# EAGLE board Qwiic_BME688-Panel (EAGLE 9.6.2), part 1 of 3
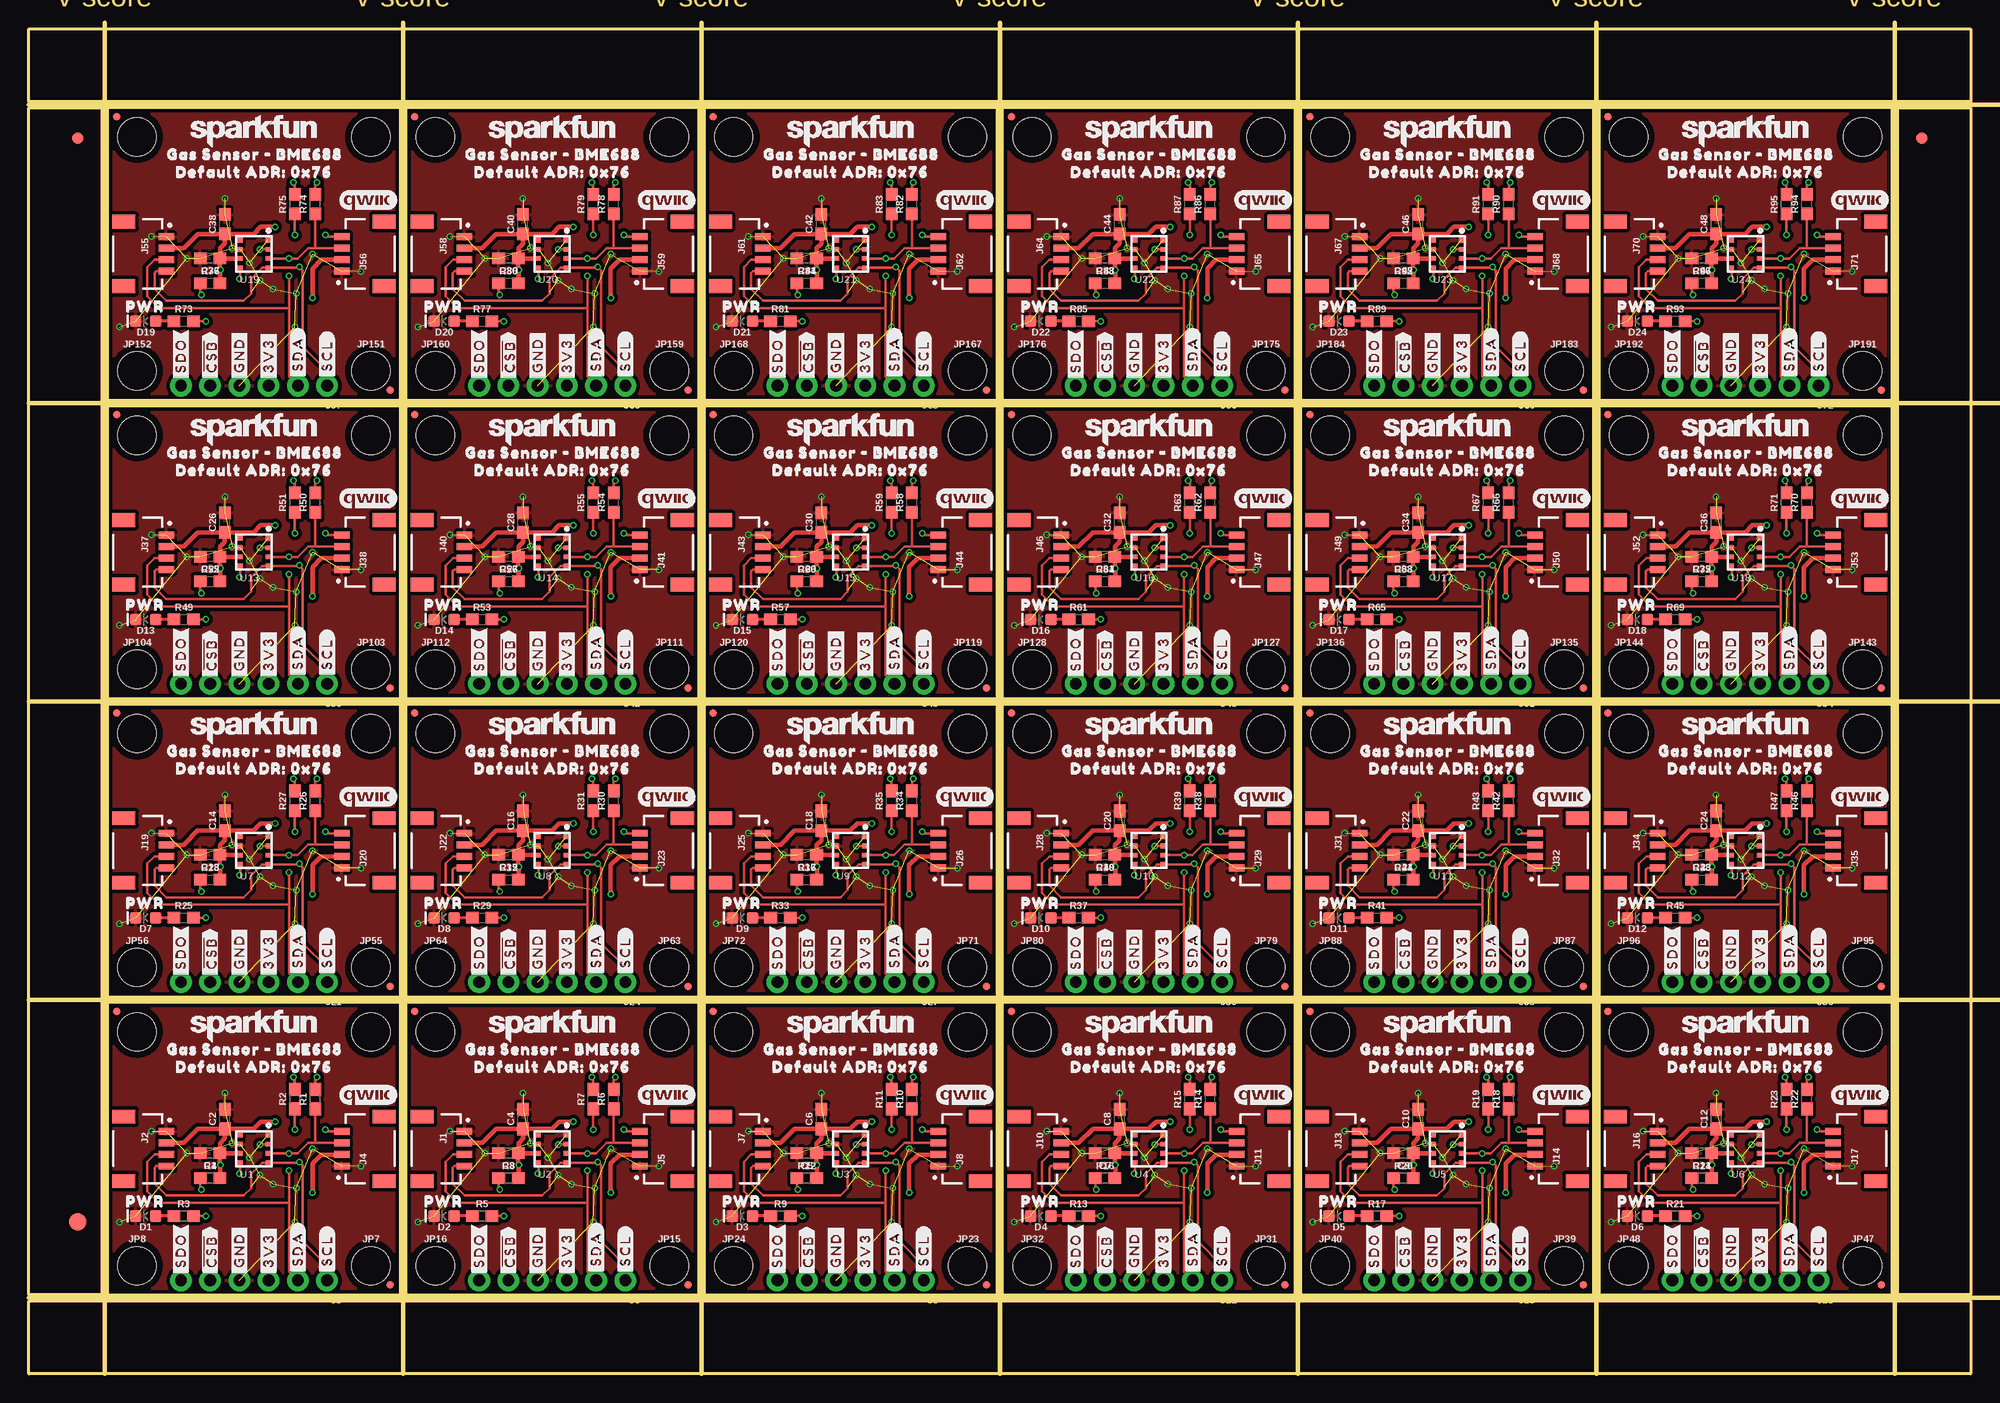
[diagram p0: board, top side]
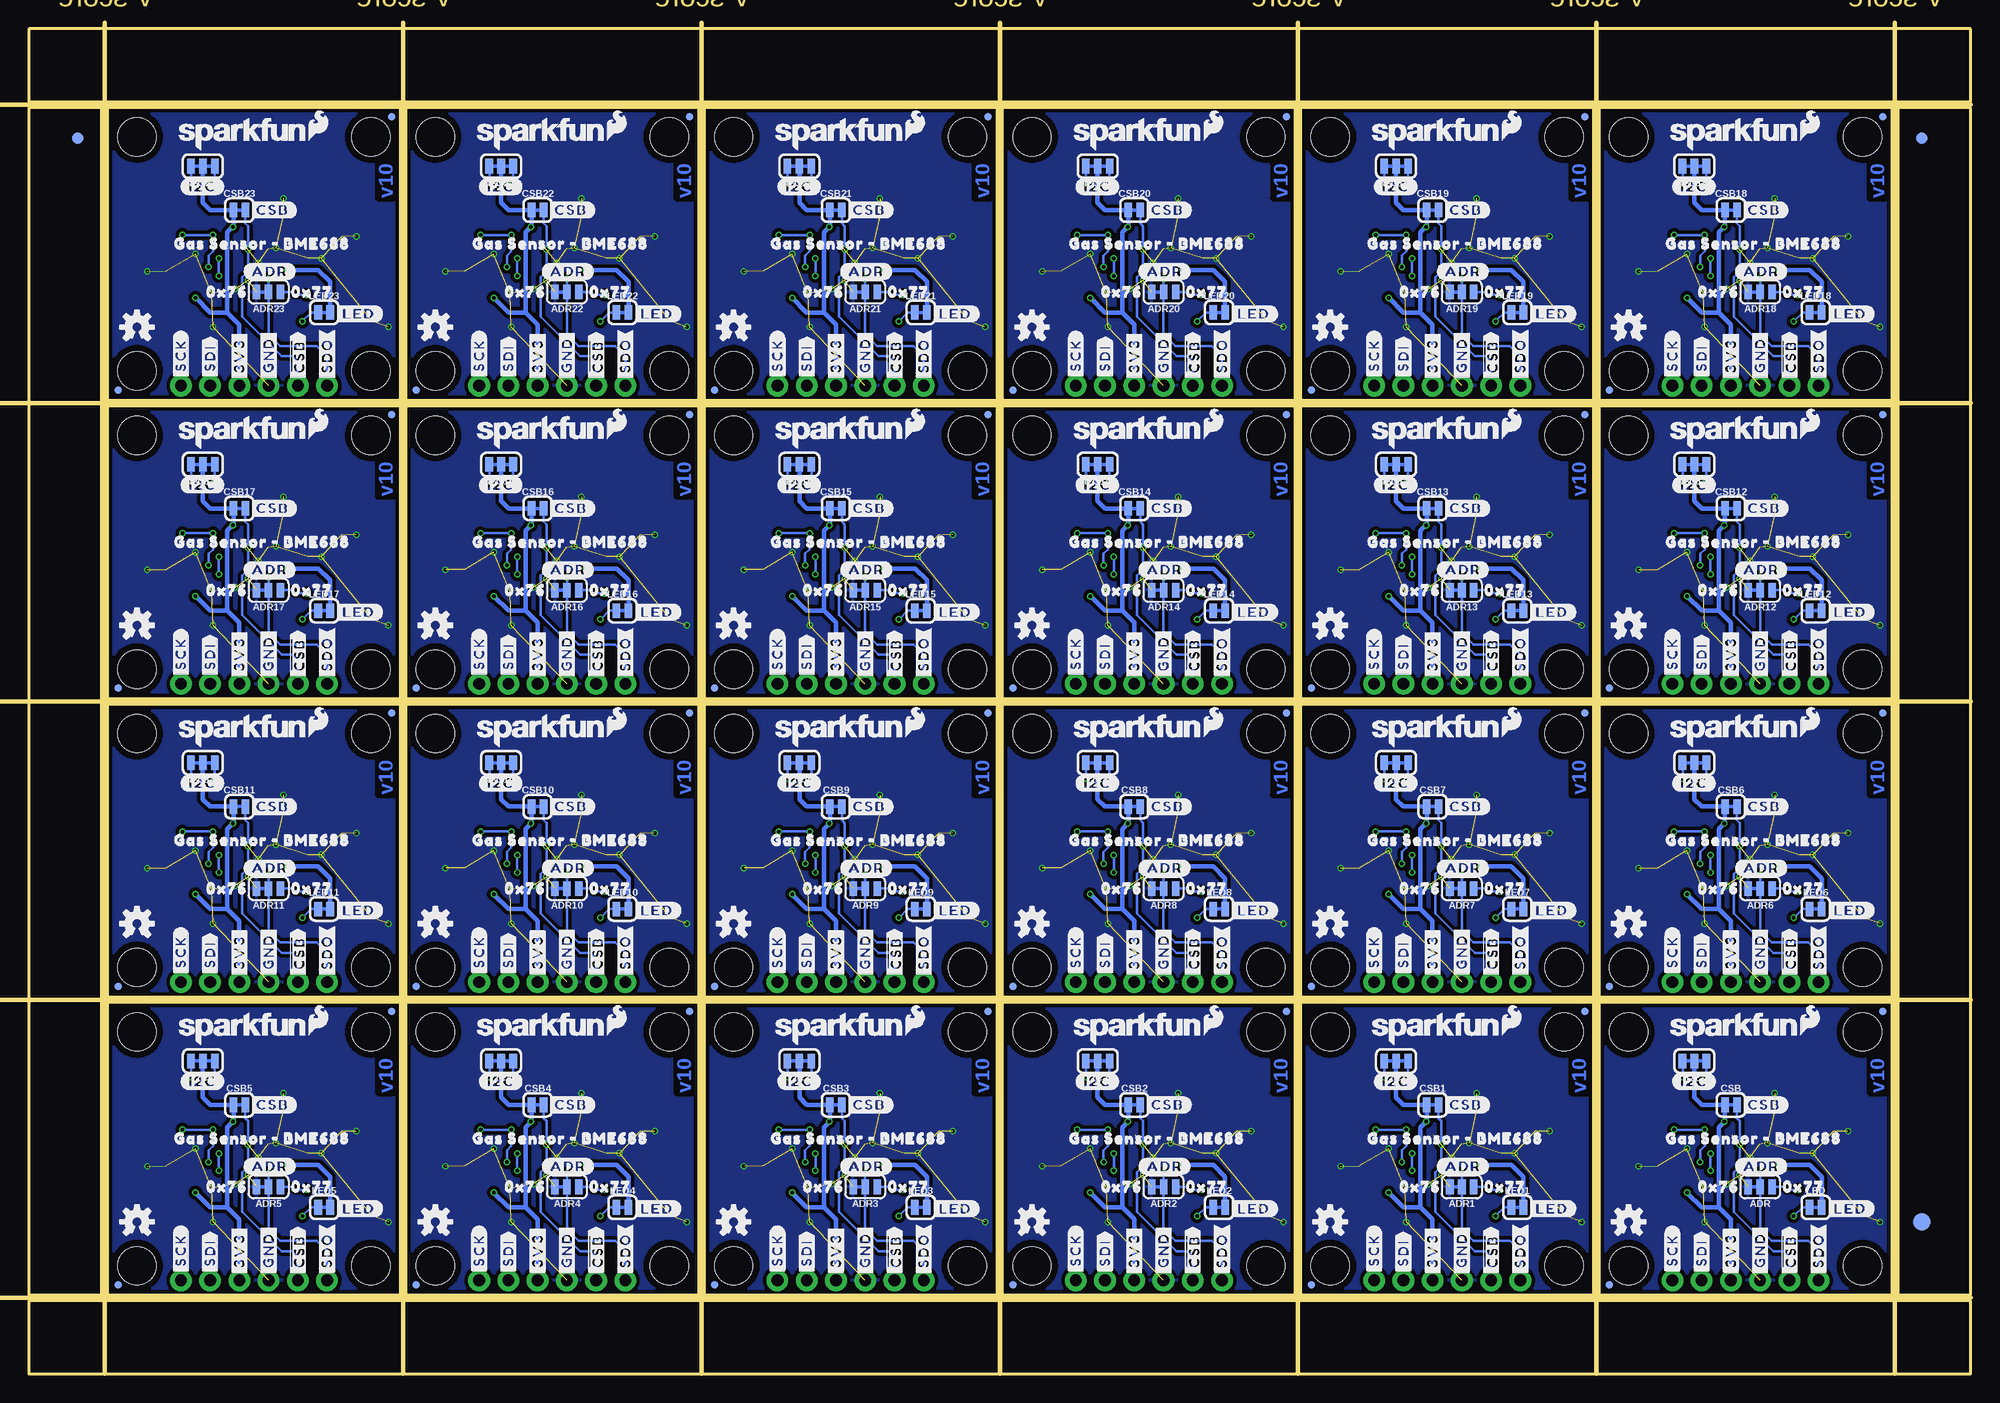
[diagram p1: board, bottom side, seen from below]

Size 168.66 x 116.84 mm. Coordinates in mm from the lower left corner, seen from the top.
Outline: 6.86,6.86 6.86,32.26 32.26,32.26 32.26,6.86 6.86,6.86
Outline: 32.77,6.86 32.77,32.26 58.17,32.26 58.17,6.86 32.77,6.86
Outline: 58.67,6.86 58.67,32.26 84.07,32.26 84.07,6.86 58.67,6.86
Outline: 84.58,6.86 84.58,32.26 109.98,32.26 109.98,6.86 84.58,6.86
Outline: 110.49,6.86 110.49,32.26 135.89,32.26 135.89,6.86 110.49,6.86
Outline: 136.4,6.86 136.4,32.26 161.8,32.26 161.8,6.86 136.4,6.86
Outline: 6.86,32.77 6.86,58.17 32.26,58.17 32.26,32.77 6.86,32.77
Outline: 32.77,32.77 32.77,58.17 58.17,58.17 58.17,32.77 32.77,32.77
Outline: 58.67,32.77 58.67,58.17 84.07,58.17 84.07,32.77 58.67,32.77
Outline: 84.58,32.77 84.58,58.17 109.98,58.17 109.98,32.77 84.58,32.77
Outline: 110.49,32.77 110.49,58.17 135.89,58.17 135.89,32.77 110.49,32.77
Outline: 136.4,32.77 136.4,58.17 161.8,58.17 161.8,32.77 136.4,32.77
Outline: 6.86,58.67 6.86,84.07 32.26,84.07 32.26,58.67 6.86,58.67
Outline: 32.77,58.67 32.77,84.07 58.17,84.07 58.17,58.67 32.77,58.67
Outline: 58.67,58.67 58.67,84.07 84.07,84.07 84.07,58.67 58.67,58.67
Outline: 84.58,58.67 84.58,84.07 109.98,84.07 109.98,58.67 84.58,58.67
Outline: 110.49,58.67 110.49,84.07 135.89,84.07 135.89,58.67 110.49,58.67
Outline: 136.4,58.67 136.4,84.07 161.8,84.07 161.8,58.67 136.4,58.67
Outline: 6.86,84.58 6.86,109.98 32.26,109.98 32.26,84.58 6.86,84.58
Outline: 32.77,84.58 32.77,109.98 58.17,109.98 58.17,84.58 32.77,84.58
Outline: 58.67,84.58 58.67,109.98 84.07,109.98 84.07,84.58 58.67,84.58
Outline: 84.58,84.58 84.58,109.98 109.98,109.98 109.98,84.58 84.58,84.58
Outline: 110.49,84.58 110.49,109.98 135.89,109.98 135.89,84.58 110.49,84.58
Outline: 136.4,84.58 136.4,109.98 161.8,109.98 161.8,84.58 136.4,84.58
Outline: 0,6.35 168.66,6.35 168.66,0 0,0 0,6.35
Outline: 162.31,109.98 168.66,109.98 168.66,6.86 162.31,6.86 162.31,109.98
Outline: 0,116.84 168.66,116.84 168.66,110.49 0,110.49 0,116.84
Outline: 0,109.98 6.35,109.98 6.35,6.86 0,6.86 0,109.98
Copper layers (1*16): Top 0.035mm / dielectric 1.5mm / Bottom 0.035mm
Design rules "Qwiic_BME688": minimum track width 5mil, minimum drill 0.3mm, track to track 5mil, track to pad 5mil, pad to pad 5mil, via to via 5mil, smd to smd 5mil, copper to edge 7mil, drill to drill 7mil, minimum pad ring 5mil, minimum via ring 5mil, stop-mask expansion 2.5mil, vias tented up to drill 25mil, thermal gap 10mil
Milling: 12 lines

## Footprints (pad centres in the part's own frame; a part is rotated, then mirrored left to right if it is on the bottom)
SMT-JUMPER_3_1-NC_TRACE_SILK = smd 0.66 x 1.27: 1 -1.041,0; 2 0,0; 3 1.041,0
0603 = smd 1.1 x 1: 1 -0.85,0; 2 0.85,0
SMT-JUMPER_2_NC_TRACE_SILK = smd 0.66 x 1.27: 1 -0.521,0; 2 0.521,0
LED-0603 = smd 1 x 1: A -0.877,0; C 0.877,0
FIDUCIAL-1X2 = smd 1 x 1: 1 0,0
FIDUCIAL-1.5X3 = smd 1.5 x 1.5: 1 0,0
SMT-JUMPER_3_2-NC_TRACE_SILK = smd 0.66 x 1.27: 1 -1.041,0; 2 0,0; 3 1.041,0
JST04_1MM_RA = smd 0.6 x 1.35: 1 -1.5,0; 2 -0.5,0; 3 0.5,0; 4 1.5,0 | smd 1.2 x 2: NC1 2.8,-3.675; NC2 -2.8,-3.675
1X06_NO_SILK = drill 1.016 pad 1.88: 1 0,0; 2 2.54,0; 3 5.08,0; 4 7.62,0; 5 10.16,0; 6 12.7,0
FIDUCIAL-MICRO = smd 0.635 x 0.635: 1 0,0
STAND-OFF = hole 3.302: 0,0
LGA_8PIN = smd 0.4 x 0.4: 1 1.2,1.2; 2 1.2,0.4; 3 1.2,-0.4; 4 1.2,-1.2; 5 -1.2,-1.2; 6 -1.2,-0.4; 7 -1.2,0.4; 8 -1.2,1.2

## Placement (x,y rotation side)
ADR  JUMPER-SMT_3_1-NC_TRACE_SILK  [SMT-JUMPER_3_1-NC_TRACE_SILK]  18.29,16.26 180 bottom
ADR1  JUMPER-SMT_3_1-NC_TRACE_SILK  [SMT-JUMPER_3_1-NC_TRACE_SILK]  44.2,16.26 180 bottom
ADR2  JUMPER-SMT_3_1-NC_TRACE_SILK  [SMT-JUMPER_3_1-NC_TRACE_SILK]  70.1,16.26 180 bottom
ADR3  JUMPER-SMT_3_1-NC_TRACE_SILK  [SMT-JUMPER_3_1-NC_TRACE_SILK]  96.01,16.26 180 bottom
ADR4  JUMPER-SMT_3_1-NC_TRACE_SILK  [SMT-JUMPER_3_1-NC_TRACE_SILK]  121.92,16.26 180 bottom
ADR5  JUMPER-SMT_3_1-NC_TRACE_SILK  [SMT-JUMPER_3_1-NC_TRACE_SILK]  147.83,16.26 180 bottom
ADR6  JUMPER-SMT_3_1-NC_TRACE_SILK  [SMT-JUMPER_3_1-NC_TRACE_SILK]  18.29,42.16 180 bottom
ADR7  JUMPER-SMT_3_1-NC_TRACE_SILK  [SMT-JUMPER_3_1-NC_TRACE_SILK]  44.2,42.16 180 bottom
ADR8  JUMPER-SMT_3_1-NC_TRACE_SILK  [SMT-JUMPER_3_1-NC_TRACE_SILK]  70.1,42.16 180 bottom
ADR9  JUMPER-SMT_3_1-NC_TRACE_SILK  [SMT-JUMPER_3_1-NC_TRACE_SILK]  96.01,42.16 180 bottom
ADR10  JUMPER-SMT_3_1-NC_TRACE_SILK  [SMT-JUMPER_3_1-NC_TRACE_SILK]  121.92,42.16 180 bottom
ADR11  JUMPER-SMT_3_1-NC_TRACE_SILK  [SMT-JUMPER_3_1-NC_TRACE_SILK]  147.83,42.16 180 bottom
ADR12  JUMPER-SMT_3_1-NC_TRACE_SILK  [SMT-JUMPER_3_1-NC_TRACE_SILK]  18.29,68.07 180 bottom
ADR13  JUMPER-SMT_3_1-NC_TRACE_SILK  [SMT-JUMPER_3_1-NC_TRACE_SILK]  44.2,68.07 180 bottom
ADR14  JUMPER-SMT_3_1-NC_TRACE_SILK  [SMT-JUMPER_3_1-NC_TRACE_SILK]  70.1,68.07 180 bottom
ADR15  JUMPER-SMT_3_1-NC_TRACE_SILK  [SMT-JUMPER_3_1-NC_TRACE_SILK]  96.01,68.07 180 bottom
ADR16  JUMPER-SMT_3_1-NC_TRACE_SILK  [SMT-JUMPER_3_1-NC_TRACE_SILK]  121.92,68.07 180 bottom
ADR17  JUMPER-SMT_3_1-NC_TRACE_SILK  [SMT-JUMPER_3_1-NC_TRACE_SILK]  147.83,68.07 180 bottom
ADR18  JUMPER-SMT_3_1-NC_TRACE_SILK  [SMT-JUMPER_3_1-NC_TRACE_SILK]  18.29,93.98 180 bottom
ADR19  JUMPER-SMT_3_1-NC_TRACE_SILK  [SMT-JUMPER_3_1-NC_TRACE_SILK]  44.2,93.98 180 bottom
ADR20  JUMPER-SMT_3_1-NC_TRACE_SILK  [SMT-JUMPER_3_1-NC_TRACE_SILK]  70.1,93.98 180 bottom
ADR21  JUMPER-SMT_3_1-NC_TRACE_SILK  [SMT-JUMPER_3_1-NC_TRACE_SILK]  96.01,93.98 180 bottom
ADR22  JUMPER-SMT_3_1-NC_TRACE_SILK  [SMT-JUMPER_3_1-NC_TRACE_SILK]  121.92,93.98 180 bottom
ADR23  JUMPER-SMT_3_1-NC_TRACE_SILK  [SMT-JUMPER_3_1-NC_TRACE_SILK]  147.83,93.98 180 bottom
C1  0.1uF  [0603]  15.75,19.18 180 top
C2  0.1uF  [0603]  17.02,22.14 90 top
C3  0.1uF  [0603]  41.66,19.18 180 top
C4  0.1uF  [0603]  42.93,22.14 90 top
C5  0.1uF  [0603]  67.56,19.18 180 top
C6  0.1uF  [0603]  68.83,22.14 90 top
C7  0.1uF  [0603]  93.47,19.18 180 top
C8  0.1uF  [0603]  94.74,22.14 90 top
C9  0.1uF  [0603]  119.38,19.18 180 top
C10  0.1uF  [0603]  120.65,22.14 90 top
C11  0.1uF  [0603]  145.29,19.18 180 top
C12  0.1uF  [0603]  146.56,22.14 90 top
C13  0.1uF  [0603]  15.75,45.08 180 top
C14  0.1uF  [0603]  17.02,48.04 90 top
C15  0.1uF  [0603]  41.66,45.08 180 top
C16  0.1uF  [0603]  42.93,48.04 90 top
C17  0.1uF  [0603]  67.56,45.08 180 top
C18  0.1uF  [0603]  68.83,48.04 90 top
C19  0.1uF  [0603]  93.47,45.08 180 top
C20  0.1uF  [0603]  94.74,48.04 90 top
C21  0.1uF  [0603]  119.38,45.08 180 top
C22  0.1uF  [0603]  120.65,48.04 90 top
C23  0.1uF  [0603]  145.29,45.08 180 top
C24  0.1uF  [0603]  146.56,48.04 90 top
C25  0.1uF  [0603]  15.75,70.99 180 top
C26  0.1uF  [0603]  17.02,73.95 90 top
C27  0.1uF  [0603]  41.66,70.99 180 top
C28  0.1uF  [0603]  42.93,73.95 90 top
C29  0.1uF  [0603]  67.56,70.99 180 top
C30  0.1uF  [0603]  68.83,73.95 90 top
C31  0.1uF  [0603]  93.47,70.99 180 top
C32  0.1uF  [0603]  94.74,73.95 90 top
C33  0.1uF  [0603]  119.38,70.99 180 top
C34  0.1uF  [0603]  120.65,73.95 90 top
C35  0.1uF  [0603]  145.29,70.99 180 top
C36  0.1uF  [0603]  146.56,73.95 90 top
C37  0.1uF  [0603]  15.75,96.9 180 top
C38  0.1uF  [0603]  17.02,99.86 90 top
C39  0.1uF  [0603]  41.66,96.9 180 top
C40  0.1uF  [0603]  42.93,99.86 90 top
C41  0.1uF  [0603]  67.56,96.9 180 top
C42  0.1uF  [0603]  68.83,99.86 90 top
C43  0.1uF  [0603]  93.47,96.9 180 top
C44  0.1uF  [0603]  94.74,99.86 90 top
C45  0.1uF  [0603]  119.38,96.9 180 top
C46  0.1uF  [0603]  120.65,99.86 90 top
C47  0.1uF  [0603]  145.29,96.9 180 top
C48  0.1uF  [0603]  146.56,99.86 90 top
CSB  JUMPER-SMT_2_NC_TRACE_SILK  [SMT-JUMPER_2_NC_TRACE_SILK]  20.83,23.37 0 bottom
CSB1  JUMPER-SMT_2_NC_TRACE_SILK  [SMT-JUMPER_2_NC_TRACE_SILK]  46.74,23.37 0 bottom
CSB2  JUMPER-SMT_2_NC_TRACE_SILK  [SMT-JUMPER_2_NC_TRACE_SILK]  72.64,23.37 0 bottom
CSB3  JUMPER-SMT_2_NC_TRACE_SILK  [SMT-JUMPER_2_NC_TRACE_SILK]  98.55,23.37 0 bottom
CSB4  JUMPER-SMT_2_NC_TRACE_SILK  [SMT-JUMPER_2_NC_TRACE_SILK]  124.46,23.37 0 bottom
CSB5  JUMPER-SMT_2_NC_TRACE_SILK  [SMT-JUMPER_2_NC_TRACE_SILK]  150.37,23.37 0 bottom
CSB6  JUMPER-SMT_2_NC_TRACE_SILK  [SMT-JUMPER_2_NC_TRACE_SILK]  20.83,49.28 0 bottom
CSB7  JUMPER-SMT_2_NC_TRACE_SILK  [SMT-JUMPER_2_NC_TRACE_SILK]  46.74,49.28 0 bottom
CSB8  JUMPER-SMT_2_NC_TRACE_SILK  [SMT-JUMPER_2_NC_TRACE_SILK]  72.64,49.28 0 bottom
CSB9  JUMPER-SMT_2_NC_TRACE_SILK  [SMT-JUMPER_2_NC_TRACE_SILK]  98.55,49.28 0 bottom
CSB10  JUMPER-SMT_2_NC_TRACE_SILK  [SMT-JUMPER_2_NC_TRACE_SILK]  124.46,49.28 0 bottom
CSB11  JUMPER-SMT_2_NC_TRACE_SILK  [SMT-JUMPER_2_NC_TRACE_SILK]  150.37,49.28 0 bottom
CSB12  JUMPER-SMT_2_NC_TRACE_SILK  [SMT-JUMPER_2_NC_TRACE_SILK]  20.83,75.18 0 bottom
CSB13  JUMPER-SMT_2_NC_TRACE_SILK  [SMT-JUMPER_2_NC_TRACE_SILK]  46.74,75.18 0 bottom
CSB14  JUMPER-SMT_2_NC_TRACE_SILK  [SMT-JUMPER_2_NC_TRACE_SILK]  72.64,75.18 0 bottom
CSB15  JUMPER-SMT_2_NC_TRACE_SILK  [SMT-JUMPER_2_NC_TRACE_SILK]  98.55,75.18 0 bottom
CSB16  JUMPER-SMT_2_NC_TRACE_SILK  [SMT-JUMPER_2_NC_TRACE_SILK]  124.46,75.18 0 bottom
CSB17  JUMPER-SMT_2_NC_TRACE_SILK  [SMT-JUMPER_2_NC_TRACE_SILK]  150.37,75.18 0 bottom
CSB18  JUMPER-SMT_2_NC_TRACE_SILK  [SMT-JUMPER_2_NC_TRACE_SILK]  20.83,101.09 0 bottom
CSB19  JUMPER-SMT_2_NC_TRACE_SILK  [SMT-JUMPER_2_NC_TRACE_SILK]  46.74,101.09 0 bottom
CSB20  JUMPER-SMT_2_NC_TRACE_SILK  [SMT-JUMPER_2_NC_TRACE_SILK]  72.64,101.09 0 bottom
CSB21  JUMPER-SMT_2_NC_TRACE_SILK  [SMT-JUMPER_2_NC_TRACE_SILK]  98.55,101.09 0 bottom
CSB22  JUMPER-SMT_2_NC_TRACE_SILK  [SMT-JUMPER_2_NC_TRACE_SILK]  124.46,101.09 0 bottom
CSB23  JUMPER-SMT_2_NC_TRACE_SILK  [SMT-JUMPER_2_NC_TRACE_SILK]  150.37,101.09 0 bottom
D1  RED  [LED-0603]  10.16,13.72 180 top
D2  RED  [LED-0603]  36.07,13.72 180 top
D3  RED  [LED-0603]  61.98,13.72 180 top
D4  RED  [LED-0603]  87.88,13.72 180 top
D5  RED  [LED-0603]  113.79,13.72 180 top
D6  RED  [LED-0603]  139.7,13.72 180 top
D7  RED  [LED-0603]  10.16,39.62 180 top
D8  RED  [LED-0603]  36.07,39.62 180 top
D9  RED  [LED-0603]  61.98,39.62 180 top
D10  RED  [LED-0603]  87.88,39.62 180 top
D11  RED  [LED-0603]  113.79,39.62 180 top
D12  RED  [LED-0603]  139.7,39.62 180 top
D13  RED  [LED-0603]  10.16,65.53 180 top
D14  RED  [LED-0603]  36.07,65.53 180 top
D15  RED  [LED-0603]  61.98,65.53 180 top
D16  RED  [LED-0603]  87.88,65.53 180 top
D17  RED  [LED-0603]  113.79,65.53 180 top
D18  RED  [LED-0603]  139.7,65.53 180 top
D19  RED  [LED-0603]  10.16,91.44 180 top
D20  RED  [LED-0603]  36.07,91.44 180 top
D21  RED  [LED-0603]  61.98,91.44 180 top
D22  RED  [LED-0603]  87.88,91.44 180 top
D23  RED  [LED-0603]  113.79,91.44 180 top
D24  RED  [LED-0603]  139.7,91.44 180 top
E$1  [FIDUCIAL-1X2]  4.23,107.31 0 top
E$2  [FIDUCIAL-1X2]  4.23,107.31 0 bottom
E$3  [FIDUCIAL-1X2]  164.42,107.31 0 top
E$4  [FIDUCIAL-1X2]  164.42,107.31 0 bottom
E$5  [FIDUCIAL-1.5X3]  4.23,13.21 0 top
E$6  [FIDUCIAL-1.5X3]  4.23,13.21 0 bottom
I2C  JUMPER-SMT_3_2-NC_TRACE_SILK  [SMT-JUMPER_3_2-NC_TRACE_SILK]  24,27.18 180 bottom
I2C1  JUMPER-SMT_3_2-NC_TRACE_SILK  [SMT-JUMPER_3_2-NC_TRACE_SILK]  49.91,27.18 180 bottom
I2C2  JUMPER-SMT_3_2-NC_TRACE_SILK  [SMT-JUMPER_3_2-NC_TRACE_SILK]  75.82,27.18 180 bottom
I2C3  JUMPER-SMT_3_2-NC_TRACE_SILK  [SMT-JUMPER_3_2-NC_TRACE_SILK]  101.73,27.18 180 bottom
I2C4  JUMPER-SMT_3_2-NC_TRACE_SILK  [SMT-JUMPER_3_2-NC_TRACE_SILK]  127.64,27.18 180 bottom
I2C5  JUMPER-SMT_3_2-NC_TRACE_SILK  [SMT-JUMPER_3_2-NC_TRACE_SILK]  153.54,27.18 180 bottom
I2C6  JUMPER-SMT_3_2-NC_TRACE_SILK  [SMT-JUMPER_3_2-NC_TRACE_SILK]  24,53.09 180 bottom
I2C7  JUMPER-SMT_3_2-NC_TRACE_SILK  [SMT-JUMPER_3_2-NC_TRACE_SILK]  49.91,53.09 180 bottom
I2C8  JUMPER-SMT_3_2-NC_TRACE_SILK  [SMT-JUMPER_3_2-NC_TRACE_SILK]  75.82,53.09 180 bottom
I2C9  JUMPER-SMT_3_2-NC_TRACE_SILK  [SMT-JUMPER_3_2-NC_TRACE_SILK]  101.73,53.09 180 bottom
I2C10  JUMPER-SMT_3_2-NC_TRACE_SILK  [SMT-JUMPER_3_2-NC_TRACE_SILK]  127.64,53.09 180 bottom
I2C11  JUMPER-SMT_3_2-NC_TRACE_SILK  [SMT-JUMPER_3_2-NC_TRACE_SILK]  153.54,53.09 180 bottom
I2C12  JUMPER-SMT_3_2-NC_TRACE_SILK  [SMT-JUMPER_3_2-NC_TRACE_SILK]  24,78.99 180 bottom
I2C13  JUMPER-SMT_3_2-NC_TRACE_SILK  [SMT-JUMPER_3_2-NC_TRACE_SILK]  49.91,78.99 180 bottom
I2C14  JUMPER-SMT_3_2-NC_TRACE_SILK  [SMT-JUMPER_3_2-NC_TRACE_SILK]  75.82,78.99 180 bottom
I2C15  JUMPER-SMT_3_2-NC_TRACE_SILK  [SMT-JUMPER_3_2-NC_TRACE_SILK]  101.73,78.99 180 bottom
I2C16  JUMPER-SMT_3_2-NC_TRACE_SILK  [SMT-JUMPER_3_2-NC_TRACE_SILK]  127.64,78.99 180 bottom
I2C17  JUMPER-SMT_3_2-NC_TRACE_SILK  [SMT-JUMPER_3_2-NC_TRACE_SILK]  153.54,78.99 180 bottom
I2C18  JUMPER-SMT_3_2-NC_TRACE_SILK  [SMT-JUMPER_3_2-NC_TRACE_SILK]  24,104.9 180 bottom
I2C19  JUMPER-SMT_3_2-NC_TRACE_SILK  [SMT-JUMPER_3_2-NC_TRACE_SILK]  49.91,104.9 180 bottom
I2C20  JUMPER-SMT_3_2-NC_TRACE_SILK  [SMT-JUMPER_3_2-NC_TRACE_SILK]  75.82,104.9 180 bottom
I2C21  JUMPER-SMT_3_2-NC_TRACE_SILK  [SMT-JUMPER_3_2-NC_TRACE_SILK]  101.73,104.9 180 bottom
I2C22  JUMPER-SMT_3_2-NC_TRACE_SILK  [SMT-JUMPER_3_2-NC_TRACE_SILK]  127.64,104.9 180 bottom
I2C23  JUMPER-SMT_3_2-NC_TRACE_SILK  [SMT-JUMPER_3_2-NC_TRACE_SILK]  153.54,104.9 180 bottom
J1  QWIIC_RA  [JST04_1MM_RA]  37.85,19.56 270 top
J2  QWIIC_RA  [JST04_1MM_RA]  11.94,19.56 270 top
J3  [1X06_NO_SILK]  25.91,8.13 180 top
J4  QWIIC_RA  [JST04_1MM_RA]  27.18,19.56 90 top
J5  QWIIC_RA  [JST04_1MM_RA]  53.09,19.56 90 top
J6  [1X06_NO_SILK]  51.82,8.13 180 top
J7  QWIIC_RA  [JST04_1MM_RA]  63.75,19.56 270 top
J8  QWIIC_RA  [JST04_1MM_RA]  78.99,19.56 90 top
J9  [1X06_NO_SILK]  77.72,8.13 180 top
J10  QWIIC_RA  [JST04_1MM_RA]  89.66,19.56 270 top
J11  QWIIC_RA  [JST04_1MM_RA]  104.9,19.56 90 top
J12  [1X06_NO_SILK]  103.63,8.13 180 top
J13  QWIIC_RA  [JST04_1MM_RA]  115.57,19.56 270 top
J14  QWIIC_RA  [JST04_1MM_RA]  130.81,19.56 90 top
J15  [1X06_NO_SILK]  129.54,8.13 180 top
J16  QWIIC_RA  [JST04_1MM_RA]  141.48,19.56 270 top
J17  QWIIC_RA  [JST04_1MM_RA]  156.72,19.56 90 top
J18  [1X06_NO_SILK]  155.45,8.13 180 top
J19  QWIIC_RA  [JST04_1MM_RA]  11.94,45.47 270 top
J20  QWIIC_RA  [JST04_1MM_RA]  27.18,45.47 90 top
J21  [1X06_NO_SILK]  25.91,34.04 180 top
J22  QWIIC_RA  [JST04_1MM_RA]  37.85,45.47 270 top
J23  QWIIC_RA  [JST04_1MM_RA]  53.09,45.47 90 top
J24  [1X06_NO_SILK]  51.82,34.04 180 top
J25  QWIIC_RA  [JST04_1MM_RA]  63.75,45.47 270 top
J26  QWIIC_RA  [JST04_1MM_RA]  78.99,45.47 90 top
J27  [1X06_NO_SILK]  77.72,34.04 180 top
J28  QWIIC_RA  [JST04_1MM_RA]  89.66,45.47 270 top
J29  QWIIC_RA  [JST04_1MM_RA]  104.9,45.47 90 top
J30  [1X06_NO_SILK]  103.63,34.04 180 top
J31  QWIIC_RA  [JST04_1MM_RA]  115.57,45.47 270 top
J32  QWIIC_RA  [JST04_1MM_RA]  130.81,45.47 90 top
J33  [1X06_NO_SILK]  129.54,34.04 180 top
J34  QWIIC_RA  [JST04_1MM_RA]  141.48,45.47 270 top
J35  QWIIC_RA  [JST04_1MM_RA]  156.72,45.47 90 top
J36  [1X06_NO_SILK]  155.45,34.04 180 top
J37  QWIIC_RA  [JST04_1MM_RA]  11.94,71.37 270 top
J38  QWIIC_RA  [JST04_1MM_RA]  27.18,71.37 90 top
J39  [1X06_NO_SILK]  25.91,59.94 180 top
J40  QWIIC_RA  [JST04_1MM_RA]  37.85,71.37 270 top
J41  QWIIC_RA  [JST04_1MM_RA]  53.09,71.37 90 top
J42  [1X06_NO_SILK]  51.82,59.94 180 top
J43  QWIIC_RA  [JST04_1MM_RA]  63.75,71.37 270 top
J44  QWIIC_RA  [JST04_1MM_RA]  78.99,71.37 90 top
J45  [1X06_NO_SILK]  77.72,59.94 180 top
J46  QWIIC_RA  [JST04_1MM_RA]  89.66,71.37 270 top
J47  QWIIC_RA  [JST04_1MM_RA]  104.9,71.37 90 top
J48  [1X06_NO_SILK]  103.63,59.94 180 top
J49  QWIIC_RA  [JST04_1MM_RA]  115.57,71.37 270 top
J50  QWIIC_RA  [JST04_1MM_RA]  130.81,71.37 90 top
J51  [1X06_NO_SILK]  129.54,59.94 180 top
J52  QWIIC_RA  [JST04_1MM_RA]  141.48,71.37 270 top
J53  QWIIC_RA  [JST04_1MM_RA]  156.72,71.37 90 top
J54  [1X06_NO_SILK]  155.45,59.94 180 top
J55  QWIIC_RA  [JST04_1MM_RA]  11.94,97.28 270 top
J56  QWIIC_RA  [JST04_1MM_RA]  27.18,97.28 90 top
J57  [1X06_NO_SILK]  25.91,85.85 180 top
J58  QWIIC_RA  [JST04_1MM_RA]  37.85,97.28 270 top
J59  QWIIC_RA  [JST04_1MM_RA]  53.09,97.28 90 top
J60  [1X06_NO_SILK]  51.82,85.85 180 top
J61  QWIIC_RA  [JST04_1MM_RA]  63.75,97.28 270 top
J62  QWIIC_RA  [JST04_1MM_RA]  78.99,97.28 90 top
J63  [1X06_NO_SILK]  77.72,85.85 180 top
J64  QWIIC_RA  [JST04_1MM_RA]  89.66,97.28 270 top
J65  QWIIC_RA  [JST04_1MM_RA]  104.9,97.28 90 top
J66  [1X06_NO_SILK]  103.63,85.85 180 top
J67  QWIIC_RA  [JST04_1MM_RA]  115.57,97.28 270 top
J68  QWIIC_RA  [JST04_1MM_RA]  130.81,97.28 90 top
J69  [1X06_NO_SILK]  129.54,85.85 180 top
J70  QWIIC_RA  [JST04_1MM_RA]  141.48,97.28 270 top
J71  QWIIC_RA  [JST04_1MM_RA]  156.72,97.28 90 top
J72  [1X06_NO_SILK]  155.45,85.85 180 top
JP1  FIDUCIALUFIDUCIAL  [FIDUCIAL-MICRO]  7.62,31.5 0 bottom
JP2  FIDUCIALUFIDUCIAL  [FIDUCIAL-MICRO]  31.37,7.75 0 top
JP3  STAND-OFF  [STAND-OFF]  9.4,29.72 0 top
JP4  STAND-OFF  [STAND-OFF]  29.72,29.72 0 top
JP5  FIDUCIALUFIDUCIAL  [FIDUCIAL-MICRO]  31.37,7.75 0 bottom
JP6  FIDUCIALUFIDUCIAL  [FIDUCIAL-MICRO]  7.62,31.5 0 top
JP7  STAND-OFF  [STAND-OFF]  29.72,9.4 0 top
JP8  STAND-OFF  [STAND-OFF]  9.4,9.4 0 top
JP9  STAND-OFF  [STAND-OFF]  35.31,29.72 0 top
JP10  STAND-OFF  [STAND-OFF]  55.63,29.72 0 top
JP11  FIDUCIALUFIDUCIAL  [FIDUCIAL-MICRO]  57.28,7.75 0 top
JP12  FIDUCIALUFIDUCIAL  [FIDUCIAL-MICRO]  33.53,31.5 0 top
JP13  FIDUCIALUFIDUCIAL  [FIDUCIAL-MICRO]  33.53,31.5 0 bottom
JP14  FIDUCIALUFIDUCIAL  [FIDUCIAL-MICRO]  57.28,7.75 0 bottom
JP15  STAND-OFF  [STAND-OFF]  55.63,9.4 0 top
JP16  STAND-OFF  [STAND-OFF]  35.31,9.4 0 top
JP17  STAND-OFF  [STAND-OFF]  61.21,29.72 0 top
JP18  STAND-OFF  [STAND-OFF]  81.53,29.72 0 top
JP19  FIDUCIALUFIDUCIAL  [FIDUCIAL-MICRO]  83.19,7.75 0 top
JP20  FIDUCIALUFIDUCIAL  [FIDUCIAL-MICRO]  59.44,31.5 0 top
JP21  FIDUCIALUFIDUCIAL  [FIDUCIAL-MICRO]  59.44,31.5 0 bottom
JP22  FIDUCIALUFIDUCIAL  [FIDUCIAL-MICRO]  83.19,7.75 0 bottom
JP23  STAND-OFF  [STAND-OFF]  81.53,9.4 0 top
JP24  STAND-OFF  [STAND-OFF]  61.21,9.4 0 top
JP25  STAND-OFF  [STAND-OFF]  87.12,29.72 0 top
JP26  STAND-OFF  [STAND-OFF]  107.44,29.72 0 top
JP27  FIDUCIALUFIDUCIAL  [FIDUCIAL-MICRO]  109.09,7.75 0 top
JP28  FIDUCIALUFIDUCIAL  [FIDUCIAL-MICRO]  85.34,31.5 0 top
JP29  FIDUCIALUFIDUCIAL  [FIDUCIAL-MICRO]  85.34,31.5 0 bottom
JP30  FIDUCIALUFIDUCIAL  [FIDUCIAL-MICRO]  109.09,7.75 0 bottom
JP31  STAND-OFF  [STAND-OFF]  107.44,9.4 0 top
JP32  STAND-OFF  [STAND-OFF]  87.12,9.4 0 top
JP33  STAND-OFF  [STAND-OFF]  113.03,29.72 0 top
JP34  STAND-OFF  [STAND-OFF]  133.35,29.72 0 top
JP35  FIDUCIALUFIDUCIAL  [FIDUCIAL-MICRO]  135,7.75 0 top
JP36  FIDUCIALUFIDUCIAL  [FIDUCIAL-MICRO]  111.25,31.5 0 top
JP37  FIDUCIALUFIDUCIAL  [FIDUCIAL-MICRO]  111.25,31.5 0 bottom
JP38  FIDUCIALUFIDUCIAL  [FIDUCIAL-MICRO]  135,7.75 0 bottom
JP39  STAND-OFF  [STAND-OFF]  133.35,9.4 0 top
JP40  STAND-OFF  [STAND-OFF]  113.03,9.4 0 top
JP41  STAND-OFF  [STAND-OFF]  138.94,29.72 0 top
JP42  STAND-OFF  [STAND-OFF]  159.26,29.72 0 top
JP43  FIDUCIALUFIDUCIAL  [FIDUCIAL-MICRO]  160.91,7.75 0 top
JP44  FIDUCIALUFIDUCIAL  [FIDUCIAL-MICRO]  137.16,31.5 0 top
JP45  FIDUCIALUFIDUCIAL  [FIDUCIAL-MICRO]  137.16,31.5 0 bottom
JP46  FIDUCIALUFIDUCIAL  [FIDUCIAL-MICRO]  160.91,7.75 0 bottom
JP47  STAND-OFF  [STAND-OFF]  159.26,9.4 0 top
JP48  STAND-OFF  [STAND-OFF]  138.94,9.4 0 top
JP49  STAND-OFF  [STAND-OFF]  9.4,55.63 0 top
JP50  STAND-OFF  [STAND-OFF]  29.72,55.63 0 top
JP51  FIDUCIALUFIDUCIAL  [FIDUCIAL-MICRO]  31.37,33.66 0 top
JP52  FIDUCIALUFIDUCIAL  [FIDUCIAL-MICRO]  7.62,57.4 0 top
JP53  FIDUCIALUFIDUCIAL  [FIDUCIAL-MICRO]  7.62,57.4 0 bottom
JP54  FIDUCIALUFIDUCIAL  [FIDUCIAL-MICRO]  31.37,33.66 0 bottom
JP55  STAND-OFF  [STAND-OFF]  29.72,35.31 0 top
JP56  STAND-OFF  [STAND-OFF]  9.4,35.31 0 top
JP57  STAND-OFF  [STAND-OFF]  35.31,55.63 0 top
JP58  STAND-OFF  [STAND-OFF]  55.63,55.63 0 top
JP59  FIDUCIALUFIDUCIAL  [FIDUCIAL-MICRO]  57.28,33.66 0 top
JP60  FIDUCIALUFIDUCIAL  [FIDUCIAL-MICRO]  33.53,57.4 0 top
JP61  FIDUCIALUFIDUCIAL  [FIDUCIAL-MICRO]  33.53,57.4 0 bottom
JP62  FIDUCIALUFIDUCIAL  [FIDUCIAL-MICRO]  57.28,33.66 0 bottom
JP63  STAND-OFF  [STAND-OFF]  55.63,35.31 0 top
JP64  STAND-OFF  [STAND-OFF]  35.31,35.31 0 top
JP65  STAND-OFF  [STAND-OFF]  61.21,55.63 0 top
JP66  STAND-OFF  [STAND-OFF]  81.53,55.63 0 top
JP67  FIDUCIALUFIDUCIAL  [FIDUCIAL-MICRO]  83.19,33.66 0 top
JP68  FIDUCIALUFIDUCIAL  [FIDUCIAL-MICRO]  59.44,57.4 0 top
JP69  FIDUCIALUFIDUCIAL  [FIDUCIAL-MICRO]  59.44,57.4 0 bottom
JP70  FIDUCIALUFIDUCIAL  [FIDUCIAL-MICRO]  83.19,33.66 0 bottom
JP71  STAND-OFF  [STAND-OFF]  81.53,35.31 0 top
JP72  STAND-OFF  [STAND-OFF]  61.21,35.31 0 top
JP73  STAND-OFF  [STAND-OFF]  87.12,55.63 0 top
JP74  STAND-OFF  [STAND-OFF]  107.44,55.63 0 top
JP75  FIDUCIALUFIDUCIAL  [FIDUCIAL-MICRO]  109.09,33.66 0 top
JP76  FIDUCIALUFIDUCIAL  [FIDUCIAL-MICRO]  85.34,57.4 0 top
JP77  FIDUCIALUFIDUCIAL  [FIDUCIAL-MICRO]  85.34,57.4 0 bottom
JP78  FIDUCIALUFIDUCIAL  [FIDUCIAL-MICRO]  109.09,33.66 0 bottom
JP79  STAND-OFF  [STAND-OFF]  107.44,35.31 0 top
JP80  STAND-OFF  [STAND-OFF]  87.12,35.31 0 top
JP81  STAND-OFF  [STAND-OFF]  113.03,55.63 0 top
JP82  STAND-OFF  [STAND-OFF]  133.35,55.63 0 top
JP83  FIDUCIALUFIDUCIAL  [FIDUCIAL-MICRO]  135,33.66 0 top
JP84  FIDUCIALUFIDUCIAL  [FIDUCIAL-MICRO]  111.25,57.4 0 top
JP85  FIDUCIALUFIDUCIAL  [FIDUCIAL-MICRO]  111.25,57.4 0 bottom
JP86  FIDUCIALUFIDUCIAL  [FIDUCIAL-MICRO]  135,33.66 0 bottom
JP87  STAND-OFF  [STAND-OFF]  133.35,35.31 0 top
JP88  STAND-OFF  [STAND-OFF]  113.03,35.31 0 top
JP89  STAND-OFF  [STAND-OFF]  138.94,55.63 0 top
JP90  STAND-OFF  [STAND-OFF]  159.26,55.63 0 top
JP91  FIDUCIALUFIDUCIAL  [FIDUCIAL-MICRO]  160.91,33.66 0 top
JP92  FIDUCIALUFIDUCIAL  [FIDUCIAL-MICRO]  137.16,57.4 0 top
JP93  FIDUCIALUFIDUCIAL  [FIDUCIAL-MICRO]  137.16,57.4 0 bottom
JP94  FIDUCIALUFIDUCIAL  [FIDUCIAL-MICRO]  160.91,33.66 0 bottom
JP95  STAND-OFF  [STAND-OFF]  159.26,35.31 0 top
JP96  STAND-OFF  [STAND-OFF]  138.94,35.31 0 top
JP97  STAND-OFF  [STAND-OFF]  9.4,81.53 0 top
JP98  STAND-OFF  [STAND-OFF]  29.72,81.53 0 top
JP99  FIDUCIALUFIDUCIAL  [FIDUCIAL-MICRO]  31.37,59.56 0 top
JP100  FIDUCIALUFIDUCIAL  [FIDUCIAL-MICRO]  7.62,83.31 0 top
JP101  FIDUCIALUFIDUCIAL  [FIDUCIAL-MICRO]  7.62,83.31 0 bottom
JP102  FIDUCIALUFIDUCIAL  [FIDUCIAL-MICRO]  31.37,59.56 0 bottom
JP103  STAND-OFF  [STAND-OFF]  29.72,61.21 0 top
JP104  STAND-OFF  [STAND-OFF]  9.4,61.21 0 top
JP105  STAND-OFF  [STAND-OFF]  35.31,81.53 0 top
JP106  STAND-OFF  [STAND-OFF]  55.63,81.53 0 top
JP107  FIDUCIALUFIDUCIAL  [FIDUCIAL-MICRO]  57.28,59.56 0 top
JP108  FIDUCIALUFIDUCIAL  [FIDUCIAL-MICRO]  33.53,83.31 0 top
JP109  FIDUCIALUFIDUCIAL  [FIDUCIAL-MICRO]  33.53,83.31 0 bottom
JP110  FIDUCIALUFIDUCIAL  [FIDUCIAL-MICRO]  57.28,59.56 0 bottom
JP111  STAND-OFF  [STAND-OFF]  55.63,61.21 0 top
JP112  STAND-OFF  [STAND-OFF]  35.31,61.21 0 top
JP113  STAND-OFF  [STAND-OFF]  61.21,81.53 0 top
JP114  STAND-OFF  [STAND-OFF]  81.53,81.53 0 top
JP115  FIDUCIALUFIDUCIAL  [FIDUCIAL-MICRO]  83.19,59.56 0 top
JP116  FIDUCIALUFIDUCIAL  [FIDUCIAL-MICRO]  59.44,83.31 0 top
JP117  FIDUCIALUFIDUCIAL  [FIDUCIAL-MICRO]  59.44,83.31 0 bottom
JP118  FIDUCIALUFIDUCIAL  [FIDUCIAL-MICRO]  83.19,59.56 0 bottom
JP119  STAND-OFF  [STAND-OFF]  81.53,61.21 0 top
JP120  STAND-OFF  [STAND-OFF]  61.21,61.21 0 top
JP121  STAND-OFF  [STAND-OFF]  87.12,81.53 0 top
JP122  STAND-OFF  [STAND-OFF]  107.44,81.53 0 top
JP123  FIDUCIALUFIDUCIAL  [FIDUCIAL-MICRO]  109.09,59.56 0 top
JP124  FIDUCIALUFIDUCIAL  [FIDUCIAL-MICRO]  85.34,83.31 0 top
JP125  FIDUCIALUFIDUCIAL  [FIDUCIAL-MICRO]  85.34,83.31 0 bottom
JP126  FIDUCIALUFIDUCIAL  [FIDUCIAL-MICRO]  109.09,59.56 0 bottom
JP127  STAND-OFF  [STAND-OFF]  107.44,61.21 0 top
JP128  STAND-OFF  [STAND-OFF]  87.12,61.21 0 top
JP129  STAND-OFF  [STAND-OFF]  113.03,81.53 0 top
JP130  STAND-OFF  [STAND-OFF]  133.35,81.53 0 top
JP131  FIDUCIALUFIDUCIAL  [FIDUCIAL-MICRO]  135,59.56 0 top
JP132  FIDUCIALUFIDUCIAL  [FIDUCIAL-MICRO]  111.25,83.31 0 top
JP133  FIDUCIALUFIDUCIAL  [FIDUCIAL-MICRO]  111.25,83.31 0 bottom
JP134  FIDUCIALUFIDUCIAL  [FIDUCIAL-MICRO]  135,59.56 0 bottom
JP135  STAND-OFF  [STAND-OFF]  133.35,61.21 0 top
JP136  STAND-OFF  [STAND-OFF]  113.03,61.21 0 top
JP137  STAND-OFF  [STAND-OFF]  138.94,81.53 0 top
JP138  STAND-OFF  [STAND-OFF]  159.26,81.53 0 top
JP139  FIDUCIALUFIDUCIAL  [FIDUCIAL-MICRO]  160.91,59.56 0 top
JP140  FIDUCIALUFIDUCIAL  [FIDUCIAL-MICRO]  137.16,83.31 0 top
JP141  FIDUCIALUFIDUCIAL  [FIDUCIAL-MICRO]  137.16,83.31 0 bottom
JP142  FIDUCIALUFIDUCIAL  [FIDUCIAL-MICRO]  160.91,59.56 0 bottom
JP143  STAND-OFF  [STAND-OFF]  159.26,61.21 0 top
JP144  STAND-OFF  [STAND-OFF]  138.94,61.21 0 top
JP145  STAND-OFF  [STAND-OFF]  9.4,107.44 0 top
JP146  STAND-OFF  [STAND-OFF]  29.72,107.44 0 top
JP147  FIDUCIALUFIDUCIAL  [FIDUCIAL-MICRO]  31.37,85.47 0 top
JP148  FIDUCIALUFIDUCIAL  [FIDUCIAL-MICRO]  7.62,109.22 0 top
JP149  FIDUCIALUFIDUCIAL  [FIDUCIAL-MICRO]  7.62,109.22 0 bottom
JP150  FIDUCIALUFIDUCIAL  [FIDUCIAL-MICRO]  31.37,85.47 0 bottom
JP151  STAND-OFF  [STAND-OFF]  29.72,87.12 0 top
JP152  STAND-OFF  [STAND-OFF]  9.4,87.12 0 top
JP153  STAND-OFF  [STAND-OFF]  35.31,107.44 0 top
JP154  STAND-OFF  [STAND-OFF]  55.63,107.44 0 top
JP155  FIDUCIALUFIDUCIAL  [FIDUCIAL-MICRO]  57.28,85.47 0 top
JP156  FIDUCIALUFIDUCIAL  [FIDUCIAL-MICRO]  33.53,109.22 0 top
JP157  FIDUCIALUFIDUCIAL  [FIDUCIAL-MICRO]  33.53,109.22 0 bottom
JP158  FIDUCIALUFIDUCIAL  [FIDUCIAL-MICRO]  57.28,85.47 0 bottom
JP159  STAND-OFF  [STAND-OFF]  55.63,87.12 0 top
JP160  STAND-OFF  [STAND-OFF]  35.31,87.12 0 top
JP161  STAND-OFF  [STAND-OFF]  61.21,107.44 0 top
JP162  STAND-OFF  [STAND-OFF]  81.53,107.44 0 top
JP163  FIDUCIALUFIDUCIAL  [FIDUCIAL-MICRO]  83.19,85.47 0 top
JP164  FIDUCIALUFIDUCIAL  [FIDUCIAL-MICRO]  59.44,109.22 0 top
JP165  FIDUCIALUFIDUCIAL  [FIDUCIAL-MICRO]  59.44,109.22 0 bottom
JP166  FIDUCIALUFIDUCIAL  [FIDUCIAL-MICRO]  83.19,85.47 0 bottom
JP167  STAND-OFF  [STAND-OFF]  81.53,87.12 0 top
JP168  STAND-OFF  [STAND-OFF]  61.21,87.12 0 top
JP169  STAND-OFF  [STAND-OFF]  87.12,107.44 0 top
JP170  STAND-OFF  [STAND-OFF]  107.44,107.44 0 top
JP171  FIDUCIALUFIDUCIAL  [FIDUCIAL-MICRO]  109.09,85.47 0 top
JP172  FIDUCIALUFIDUCIAL  [FIDUCIAL-MICRO]  85.34,109.22 0 top
JP173  FIDUCIALUFIDUCIAL  [FIDUCIAL-MICRO]  85.34,109.22 0 bottom
JP174  FIDUCIALUFIDUCIAL  [FIDUCIAL-MICRO]  109.09,85.47 0 bottom
JP175  STAND-OFF  [STAND-OFF]  107.44,87.12 0 top
JP176  STAND-OFF  [STAND-OFF]  87.12,87.12 0 top
JP177  STAND-OFF  [STAND-OFF]  113.03,107.44 0 top
JP178  STAND-OFF  [STAND-OFF]  133.35,107.44 0 top
JP179  FIDUCIALUFIDUCIAL  [FIDUCIAL-MICRO]  135,85.47 0 top
JP180  FIDUCIALUFIDUCIAL  [FIDUCIAL-MICRO]  111.25,109.22 0 top
JP181  FIDUCIALUFIDUCIAL  [FIDUCIAL-MICRO]  111.25,109.22 0 bottom
JP182  FIDUCIALUFIDUCIAL  [FIDUCIAL-MICRO]  135,85.47 0 bottom
JP183  STAND-OFF  [STAND-OFF]  133.35,87.12 0 top
JP184  STAND-OFF  [STAND-OFF]  113.03,87.12 0 top
JP185  STAND-OFF  [STAND-OFF]  138.94,107.44 0 top
JP186  STAND-OFF  [STAND-OFF]  159.26,107.44 0 top
JP187  FIDUCIALUFIDUCIAL  [FIDUCIAL-MICRO]  160.91,85.47 0 top
JP188  FIDUCIALUFIDUCIAL  [FIDUCIAL-MICRO]  137.16,109.22 0 top
JP189  FIDUCIALUFIDUCIAL  [FIDUCIAL-MICRO]  137.16,109.22 0 bottom
JP190  FIDUCIALUFIDUCIAL  [FIDUCIAL-MICRO]  160.91,85.47 0 bottom
JP191  STAND-OFF  [STAND-OFF]  159.26,87.12 0 top
JP192  STAND-OFF  [STAND-OFF]  138.94,87.12 0 top
LED  JUMPER-SMT_2_NC_TRACE_SILK  [SMT-JUMPER_2_NC_TRACE_SILK]  13.46,14.48 0 bottom
LED1  JUMPER-SMT_2_NC_TRACE_SILK  [SMT-JUMPER_2_NC_TRACE_SILK]  39.37,14.48 0 bottom
LED2  JUMPER-SMT_2_NC_TRACE_SILK  [SMT-JUMPER_2_NC_TRACE_SILK]  65.28,14.48 0 bottom
LED3  JUMPER-SMT_2_NC_TRACE_SILK  [SMT-JUMPER_2_NC_TRACE_SILK]  91.19,14.48 0 bottom
LED4  JUMPER-SMT_2_NC_TRACE_SILK  [SMT-JUMPER_2_NC_TRACE_SILK]  117.09,14.48 0 bottom
LED5  JUMPER-SMT_2_NC_TRACE_SILK  [SMT-JUMPER_2_NC_TRACE_SILK]  143,14.48 0 bottom
LED6  JUMPER-SMT_2_NC_TRACE_SILK  [SMT-JUMPER_2_NC_TRACE_SILK]  13.46,40.39 0 bottom
LED7  JUMPER-SMT_2_NC_TRACE_SILK  [SMT-JUMPER_2_NC_TRACE_SILK]  39.37,40.39 0 bottom
LED8  JUMPER-SMT_2_NC_TRACE_SILK  [SMT-JUMPER_2_NC_TRACE_SILK]  65.28,40.39 0 bottom
LED9  JUMPER-SMT_2_NC_TRACE_SILK  [SMT-JUMPER_2_NC_TRACE_SILK]  91.19,40.39 0 bottom
LED10  JUMPER-SMT_2_NC_TRACE_SILK  [SMT-JUMPER_2_NC_TRACE_SILK]  117.09,40.39 0 bottom
LED11  JUMPER-SMT_2_NC_TRACE_SILK  [SMT-JUMPER_2_NC_TRACE_SILK]  143,40.39 0 bottom
LED12  JUMPER-SMT_2_NC_TRACE_SILK  [SMT-JUMPER_2_NC_TRACE_SILK]  13.46,66.29 0 bottom
LED13  JUMPER-SMT_2_NC_TRACE_SILK  [SMT-JUMPER_2_NC_TRACE_SILK]  39.37,66.29 0 bottom
LED14  JUMPER-SMT_2_NC_TRACE_SILK  [SMT-JUMPER_2_NC_TRACE_SILK]  65.28,66.29 0 bottom
LED15  JUMPER-SMT_2_NC_TRACE_SILK  [SMT-JUMPER_2_NC_TRACE_SILK]  91.19,66.29 0 bottom
LED16  JUMPER-SMT_2_NC_TRACE_SILK  [SMT-JUMPER_2_NC_TRACE_SILK]  117.09,66.29 0 bottom
LED17  JUMPER-SMT_2_NC_TRACE_SILK  [SMT-JUMPER_2_NC_TRACE_SILK]  143,66.29 0 bottom
LED18  JUMPER-SMT_2_NC_TRACE_SILK  [SMT-JUMPER_2_NC_TRACE_SILK]  13.46,92.2 0 bottom
LED19  JUMPER-SMT_2_NC_TRACE_SILK  [SMT-JUMPER_2_NC_TRACE_SILK]  39.37,92.2 0 bottom
LED20  JUMPER-SMT_2_NC_TRACE_SILK  [SMT-JUMPER_2_NC_TRACE_SILK]  65.28,92.2 0 bottom
LED21  JUMPER-SMT_2_NC_TRACE_SILK  [SMT-JUMPER_2_NC_TRACE_SILK]  91.19,92.2 0 bottom
LED22  JUMPER-SMT_2_NC_TRACE_SILK  [SMT-JUMPER_2_NC_TRACE_SILK]  117.09,92.2 0 bottom
LED23  JUMPER-SMT_2_NC_TRACE_SILK  [SMT-JUMPER_2_NC_TRACE_SILK]  143,92.2 0 bottom
LOGO1  OSHW-LOGOS  [OSHW-LOGO-S]  55.63,13.21 0 bottom
LOGO2  QWIIC_LOGO_5MM  [QWIIC_5MM]  29.46,24.26 0 top
LOGO3  SFE_LOGO_NAME.1_INCH  [SFE_LOGO_NAME_.1]  20.57,29.97 0 bottom
LOGO4  SFE_LOGO_FLAME.1_INCH  [SFE_LOGO_FLAME_.1]  13.97,30.73 0 bottom
LOGO5  OSHW-LOGOS  [OSHW-LOGO-S]  29.72,13.21 0 bottom
LOGO6  SFE_LOGO_NAME.1_INCH  [SFE_LOGO_NAME_.1]  19.56,30.23 0 top
LOGO7  QWIIC_LOGO_5MM  [QWIIC_5MM]  55.37,24.26 0 top
LOGO8  SFE_LOGO_NAME.1_INCH  [SFE_LOGO_NAME_.1]  46.48,29.97 0 bottom
LOGO9  SFE_LOGO_FLAME.1_INCH  [SFE_LOGO_FLAME_.1]  39.88,30.73 0 bottom
LOGO10  SFE_LOGO_NAME.1_INCH  [SFE_LOGO_NAME_.1]  45.47,30.23 0 top
LOGO11  OSHW-LOGOS  [OSHW-LOGO-S]  81.53,13.21 0 bottom
LOGO12  QWIIC_LOGO_5MM  [QWIIC_5MM]  81.28,24.26 0 top
LOGO13  SFE_LOGO_NAME.1_INCH  [SFE_LOGO_NAME_.1]  72.39,29.97 0 bottom
LOGO14  SFE_LOGO_FLAME.1_INCH  [SFE_LOGO_FLAME_.1]  65.79,30.73 0 bottom
LOGO15  SFE_LOGO_NAME.1_INCH  [SFE_LOGO_NAME_.1]  71.37,30.23 0 top
LOGO16  OSHW-LOGOS  [OSHW-LOGO-S]  107.44,13.21 0 bottom
LOGO17  QWIIC_LOGO_5MM  [QWIIC_5MM]  107.19,24.26 0 top
LOGO18  SFE_LOGO_NAME.1_INCH  [SFE_LOGO_NAME_.1]  98.3,29.97 0 bottom
LOGO19  SFE_LOGO_FLAME.1_INCH  [SFE_LOGO_FLAME_.1]  91.69,30.73 0 bottom
LOGO20  SFE_LOGO_NAME.1_INCH  [SFE_LOGO_NAME_.1]  97.28,30.23 0 top
LOGO21  OSHW-LOGOS  [OSHW-LOGO-S]  133.35,13.21 0 bottom
LOGO22  QWIIC_LOGO_5MM  [QWIIC_5MM]  133.1,24.26 0 top
LOGO23  SFE_LOGO_NAME.1_INCH  [SFE_LOGO_NAME_.1]  124.21,29.97 0 bottom
LOGO24  SFE_LOGO_FLAME.1_INCH  [SFE_LOGO_FLAME_.1]  117.6,30.73 0 bottom
LOGO25  SFE_LOGO_NAME.1_INCH  [SFE_LOGO_NAME_.1]  123.19,30.23 0 top
LOGO26  OSHW-LOGOS  [OSHW-LOGO-S]  159.26,13.21 0 bottom
LOGO27  QWIIC_LOGO_5MM  [QWIIC_5MM]  159,24.26 0 top
LOGO28  SFE_LOGO_NAME.1_INCH  [SFE_LOGO_NAME_.1]  150.11,29.97 0 bottom
LOGO29  SFE_LOGO_FLAME.1_INCH  [SFE_LOGO_FLAME_.1]  143.51,30.73 0 bottom
LOGO30  SFE_LOGO_NAME.1_INCH  [SFE_LOGO_NAME_.1]  149.1,30.23 0 top
LOGO31  OSHW-LOGOS  [OSHW-LOGO-S]  29.72,39.12 0 bottom
LOGO32  QWIIC_LOGO_5MM  [QWIIC_5MM]  29.46,50.16 0 top
LOGO33  SFE_LOGO_NAME.1_INCH  [SFE_LOGO_NAME_.1]  20.57,55.88 0 bottom
LOGO34  SFE_LOGO_FLAME.1_INCH  [SFE_LOGO_FLAME_.1]  13.97,56.64 0 bottom
LOGO35  SFE_LOGO_NAME.1_INCH  [SFE_LOGO_NAME_.1]  19.56,56.13 0 top
LOGO36  OSHW-LOGOS  [OSHW-LOGO-S]  55.63,39.12 0 bottom
LOGO37  QWIIC_LOGO_5MM  [QWIIC_5MM]  55.37,50.16 0 top
LOGO38  SFE_LOGO_NAME.1_INCH  [SFE_LOGO_NAME_.1]  46.48,55.88 0 bottom
LOGO39  SFE_LOGO_FLAME.1_INCH  [SFE_LOGO_FLAME_.1]  39.88,56.64 0 bottom
LOGO40  SFE_LOGO_NAME.1_INCH  [SFE_LOGO_NAME_.1]  45.47,56.13 0 top
LOGO41  OSHW-LOGOS  [OSHW-LOGO-S]  81.53,39.12 0 bottom
LOGO42  QWIIC_LOGO_5MM  [QWIIC_5MM]  81.28,50.16 0 top
LOGO43  SFE_LOGO_NAME.1_INCH  [SFE_LOGO_NAME_.1]  72.39,55.88 0 bottom
LOGO44  SFE_LOGO_FLAME.1_INCH  [SFE_LOGO_FLAME_.1]  65.79,56.64 0 bottom
LOGO45  SFE_LOGO_NAME.1_INCH  [SFE_LOGO_NAME_.1]  71.37,56.13 0 top
LOGO46  OSHW-LOGOS  [OSHW-LOGO-S]  107.44,39.12 0 bottom
LOGO47  QWIIC_LOGO_5MM  [QWIIC_5MM]  107.19,50.16 0 top
LOGO48  SFE_LOGO_NAME.1_INCH  [SFE_LOGO_NAME_.1]  98.3,55.88 0 bottom
LOGO49  SFE_LOGO_FLAME.1_INCH  [SFE_LOGO_FLAME_.1]  91.69,56.64 0 bottom
LOGO50  SFE_LOGO_NAME.1_INCH  [SFE_LOGO_NAME_.1]  97.28,56.13 0 top
LOGO51  OSHW-LOGOS  [OSHW-LOGO-S]  133.35,39.12 0 bottom
LOGO52  QWIIC_LOGO_5MM  [QWIIC_5MM]  133.1,50.16 0 top
LOGO53  SFE_LOGO_NAME.1_INCH  [SFE_LOGO_NAME_.1]  124.21,55.88 0 bottom
LOGO54  SFE_LOGO_FLAME.1_INCH  [SFE_LOGO_FLAME_.1]  117.6,56.64 0 bottom
LOGO55  SFE_LOGO_NAME.1_INCH  [SFE_LOGO_NAME_.1]  123.19,56.13 0 top
LOGO56  OSHW-LOGOS  [OSHW-LOGO-S]  159.26,39.12 0 bottom
LOGO57  QWIIC_LOGO_5MM  [QWIIC_5MM]  159,50.16 0 top
LOGO58  SFE_LOGO_NAME.1_INCH  [SFE_LOGO_NAME_.1]  150.11,55.88 0 bottom
LOGO59  SFE_LOGO_FLAME.1_INCH  [SFE_LOGO_FLAME_.1]  143.51,56.64 0 bottom
LOGO60  SFE_LOGO_NAME.1_INCH  [SFE_LOGO_NAME_.1]  149.1,56.13 0 top
LOGO61  OSHW-LOGOS  [OSHW-LOGO-S]  29.72,65.02 0 bottom
LOGO62  QWIIC_LOGO_5MM  [QWIIC_5MM]  29.46,76.07 0 top
LOGO63  SFE_LOGO_NAME.1_INCH  [SFE_LOGO_NAME_.1]  20.57,81.79 0 bottom
LOGO64  SFE_LOGO_FLAME.1_INCH  [SFE_LOGO_FLAME_.1]  13.97,82.55 0 bottom
LOGO65  SFE_LOGO_NAME.1_INCH  [SFE_LOGO_NAME_.1]  19.56,82.04 0 top
LOGO66  OSHW-LOGOS  [OSHW-LOGO-S]  55.63,65.02 0 bottom
LOGO67  QWIIC_LOGO_5MM  [QWIIC_5MM]  55.37,76.07 0 top
LOGO68  SFE_LOGO_NAME.1_INCH  [SFE_LOGO_NAME_.1]  46.48,81.79 0 bottom
LOGO69  SFE_LOGO_FLAME.1_INCH  [SFE_LOGO_FLAME_.1]  39.88,82.55 0 bottom
LOGO70  SFE_LOGO_NAME.1_INCH  [SFE_LOGO_NAME_.1]  45.47,82.04 0 top
LOGO71  OSHW-LOGOS  [OSHW-LOGO-S]  81.53,65.02 0 bottom
LOGO72  QWIIC_LOGO_5MM  [QWIIC_5MM]  81.28,76.07 0 top
LOGO73  SFE_LOGO_NAME.1_INCH  [SFE_LOGO_NAME_.1]  72.39,81.79 0 bottom
LOGO74  SFE_LOGO_FLAME.1_INCH  [SFE_LOGO_FLAME_.1]  65.79,82.55 0 bottom
LOGO75  SFE_LOGO_NAME.1_INCH  [SFE_LOGO_NAME_.1]  71.37,82.04 0 top
LOGO76  OSHW-LOGOS  [OSHW-LOGO-S]  107.44,65.02 0 bottom
LOGO77  QWIIC_LOGO_5MM  [QWIIC_5MM]  107.19,76.07 0 top
LOGO78  SFE_LOGO_NAME.1_INCH  [SFE_LOGO_NAME_.1]  98.3,81.79 0 bottom
LOGO79  SFE_LOGO_FLAME.1_INCH  [SFE_LOGO_FLAME_.1]  91.69,82.55 0 bottom
LOGO80  SFE_LOGO_NAME.1_INCH  [SFE_LOGO_NAME_.1]  97.28,82.04 0 top
LOGO81  OSHW-LOGOS  [OSHW-LOGO-S]  133.35,65.02 0 bottom
LOGO82  QWIIC_LOGO_5MM  [QWIIC_5MM]  133.1,76.07 0 top
LOGO83  SFE_LOGO_NAME.1_INCH  [SFE_LOGO_NAME_.1]  124.21,81.79 0 bottom
LOGO84  SFE_LOGO_FLAME.1_INCH  [SFE_LOGO_FLAME_.1]  117.6,82.55 0 bottom
LOGO85  SFE_LOGO_NAME.1_INCH  [SFE_LOGO_NAME_.1]  123.19,82.04 0 top
LOGO86  OSHW-LOGOS  [OSHW-LOGO-S]  159.26,65.02 0 bottom
LOGO87  QWIIC_LOGO_5MM  [QWIIC_5MM]  159,76.07 0 top
LOGO88  SFE_LOGO_NAME.1_INCH  [SFE_LOGO_NAME_.1]  150.11,81.79 0 bottom
LOGO89  SFE_LOGO_FLAME.1_INCH  [SFE_LOGO_FLAME_.1]  143.51,82.55 0 bottom
LOGO90  SFE_LOGO_NAME.1_INCH  [SFE_LOGO_NAME_.1]  149.1,82.04 0 top
LOGO91  OSHW-LOGOS  [OSHW-LOGO-S]  29.72,90.93 0 bottom
LOGO92  QWIIC_LOGO_5MM  [QWIIC_5MM]  29.46,101.98 0 top
LOGO93  SFE_LOGO_NAME.1_INCH  [SFE_LOGO_NAME_.1]  20.57,107.7 0 bottom
LOGO94  SFE_LOGO_FLAME.1_INCH  [SFE_LOGO_FLAME_.1]  13.97,108.46 0 bottom
LOGO95  SFE_LOGO_NAME.1_INCH  [SFE_LOGO_NAME_.1]  19.56,107.95 0 top
LOGO96  OSHW-LOGOS  [OSHW-LOGO-S]  55.63,90.93 0 bottom
LOGO97  QWIIC_LOGO_5MM  [QWIIC_5MM]  55.37,101.98 0 top
LOGO98  SFE_LOGO_NAME.1_INCH  [SFE_LOGO_NAME_.1]  46.48,107.7 0 bottom
LOGO99  SFE_LOGO_FLAME.1_INCH  [SFE_LOGO_FLAME_.1]  39.88,108.46 0 bottom
LOGO100  SFE_LOGO_NAME.1_INCH  [SFE_LOGO_NAME_.1]  45.47,107.95 0 top
LOGO101  OSHW-LOGOS  [OSHW-LOGO-S]  81.53,90.93 0 bottom
LOGO102  QWIIC_LOGO_5MM  [QWIIC_5MM]  81.28,101.98 0 top
LOGO103  SFE_LOGO_NAME.1_INCH  [SFE_LOGO_NAME_.1]  72.39,107.7 0 bottom
LOGO104  SFE_LOGO_FLAME.1_INCH  [SFE_LOGO_FLAME_.1]  65.79,108.46 0 bottom
LOGO105  SFE_LOGO_NAME.1_INCH  [SFE_LOGO_NAME_.1]  71.37,107.95 0 top
LOGO106  OSHW-LOGOS  [OSHW-LOGO-S]  107.44,90.93 0 bottom
LOGO107  QWIIC_LOGO_5MM  [QWIIC_5MM]  107.19,101.98 0 top
LOGO108  SFE_LOGO_NAME.1_INCH  [SFE_LOGO_NAME_.1]  98.3,107.7 0 bottom
LOGO109  SFE_LOGO_FLAME.1_INCH  [SFE_LOGO_FLAME_.1]  91.69,108.46 0 bottom
LOGO110  SFE_LOGO_NAME.1_INCH  [SFE_LOGO_NAME_.1]  97.28,107.95 0 top
LOGO111  OSHW-LOGOS  [OSHW-LOGO-S]  133.35,90.93 0 bottom
LOGO112  QWIIC_LOGO_5MM  [QWIIC_5MM]  133.1,101.98 0 top
LOGO113  SFE_LOGO_NAME.1_INCH  [SFE_LOGO_NAME_.1]  124.21,107.7 0 bottom
LOGO114  SFE_LOGO_FLAME.1_INCH  [SFE_LOGO_FLAME_.1]  117.6,108.46 0 bottom
LOGO115  SFE_LOGO_NAME.1_INCH  [SFE_LOGO_NAME_.1]  123.19,107.95 0 top
LOGO116  OSHW-LOGOS  [OSHW-LOGO-S]  159.26,90.93 0 bottom
LOGO117  QWIIC_LOGO_5MM  [QWIIC_5MM]  159,101.98 0 top
LOGO118  SFE_LOGO_NAME.1_INCH  [SFE_LOGO_NAME_.1]  150.11,107.7 0 bottom
LOGO119  SFE_LOGO_FLAME.1_INCH  [SFE_LOGO_FLAME_.1]  143.51,108.46 0 bottom
LOGO120  SFE_LOGO_NAME.1_INCH  [SFE_LOGO_NAME_.1]  149.1,107.95 0 top
R1  2.2k  [0603]  24.89,23.88 90 top
R2  2.2k  [0603]  23.11,23.88 90 top
R3  1k  [0603]  13.46,13.72 0 top
R4  10k  [0603]  15.75,17.02 0 top
R5  1k  [0603]  39.37,13.72 0 top
R6  2.2k  [0603]  50.8,23.88 90 top
R7  2.2k  [0603]  49.02,23.88 90 top
R8  10k  [0603]  41.66,17.02 0 top
R9  1k  [0603]  65.28,13.72 0 top
R10  2.2k  [0603]  76.71,23.88 90 top
R11  2.2k  [0603]  74.93,23.88 90 top
R12  10k  [0603]  67.56,17.02 0 top
R13  1k  [0603]  91.19,13.72 0 top
R14  2.2k  [0603]  102.62,23.88 90 top
R15  2.2k  [0603]  100.84,23.88 90 top
R16  10k  [0603]  93.47,17.02 0 top
R17  1k  [0603]  117.09,13.72 0 top
R18  2.2k  [0603]  128.52,23.88 90 top
R19  2.2k  [0603]  126.75,23.88 90 top
R20  10k  [0603]  119.38,17.02 0 top
R21  1k  [0603]  143,13.72 0 top
R22  2.2k  [0603]  154.43,23.88 90 top
R23  2.2k  [0603]  152.65,23.88 90 top
R24  10k  [0603]  145.29,17.02 0 top
R25  1k  [0603]  13.46,39.62 0 top
R26  2.2k  [0603]  24.89,49.78 90 top
R27  2.2k  [0603]  23.11,49.78 90 top
R28  10k  [0603]  15.75,42.93 0 top
R29  1k  [0603]  39.37,39.62 0 top
R30  2.2k  [0603]  50.8,49.78 90 top
R31  2.2k  [0603]  49.02,49.78 90 top
R32  10k  [0603]  41.66,42.93 0 top
R33  1k  [0603]  65.28,39.62 0 top
R34  2.2k  [0603]  76.71,49.78 90 top
R35  2.2k  [0603]  74.93,49.78 90 top
R36  10k  [0603]  67.56,42.93 0 top
R37  1k  [0603]  91.19,39.62 0 top
R38  2.2k  [0603]  102.62,49.78 90 top
R39  2.2k  [0603]  100.84,49.78 90 top
R40  10k  [0603]  93.47,42.93 0 top
R41  1k  [0603]  117.09,39.62 0 top
R42  2.2k  [0603]  128.52,49.78 90 top
R43  2.2k  [0603]  126.75,49.78 90 top
R44  10k  [0603]  119.38,42.93 0 top
R45  1k  [0603]  143,39.62 0 top
R46  2.2k  [0603]  154.43,49.78 90 top
R47  2.2k  [0603]  152.65,49.78 90 top
R48  10k  [0603]  145.29,42.93 0 top
R49  1k  [0603]  13.46,65.53 0 top
R50  2.2k  [0603]  24.89,75.69 90 top
R51  2.2k  [0603]  23.11,75.69 90 top
R52  10k  [0603]  15.75,68.83 0 top
R53  1k  [0603]  39.37,65.53 0 top
R54  2.2k  [0603]  50.8,75.69 90 top
R55  2.2k  [0603]  49.02,75.69 90 top
R56  10k  [0603]  41.66,68.83 0 top
R57  1k  [0603]  65.28,65.53 0 top
R58  2.2k  [0603]  76.71,75.69 90 top
R59  2.2k  [0603]  74.93,75.69 90 top
R60  10k  [0603]  67.56,68.83 0 top
R61  1k  [0603]  91.19,65.53 0 top
R62  2.2k  [0603]  102.62,75.69 90 top
R63  2.2k  [0603]  100.84,75.69 90 top
R64  10k  [0603]  93.47,68.83 0 top
R65  1k  [0603]  117.09,65.53 0 top
R66  2.2k  [0603]  128.52,75.69 90 top
R67  2.2k  [0603]  126.75,75.69 90 top
R68  10k  [0603]  119.38,68.83 0 top
R69  1k  [0603]  143,65.53 0 top
R70  2.2k  [0603]  154.43,75.69 90 top
R71  2.2k  [0603]  152.65,75.69 90 top
R72  10k  [0603]  145.29,68.83 0 top
R73  1k  [0603]  13.46,91.44 0 top
R74  2.2k  [0603]  24.89,101.6 90 top
R75  2.2k  [0603]  23.11,101.6 90 top
R76  10k  [0603]  15.75,94.74 0 top
R77  1k  [0603]  39.37,91.44 0 top
R78  2.2k  [0603]  50.8,101.6 90 top
R79  2.2k  [0603]  49.02,101.6 90 top
R80  10k  [0603]  41.66,94.74 0 top
R81  1k  [0603]  65.28,91.44 0 top
R82  2.2k  [0603]  76.71,101.6 90 top
R83  2.2k  [0603]  74.93,101.6 90 top
R84  10k  [0603]  67.56,94.74 0 top
R85  1k  [0603]  91.19,91.44 0 top
R86  2.2k  [0603]  102.62,101.6 90 top
R87  2.2k  [0603]  100.84,101.6 90 top
R88  10k  [0603]  93.47,94.74 0 top
R89  1k  [0603]  117.09,91.44 0 top
R90  2.2k  [0603]  128.52,101.6 90 top
R91  2.2k  [0603]  126.75,101.6 90 top
R92  10k  [0603]  119.38,94.74 0 top
R93  1k  [0603]  143,91.44 0 top
R94  2.2k  [0603]  154.43,101.6 90 top
R95  2.2k  [0603]  152.65,101.6 90 top
R96  10k  [0603]  145.29,94.74 0 top
U1  BME688LGA  [LGA_8PIN]  19.56,19.56 0 top
U2  BME688LGA  [LGA_8PIN]  45.47,19.56 0 top
U3  BME688LGA  [LGA_8PIN]  71.37,19.56 0 top
U4  BME688LGA  [LGA_8PIN]  97.28,19.56 0 top
U5  BME688LGA  [LGA_8PIN]  123.19,19.56 0 top
U6  BME688LGA  [LGA_8PIN]  149.1,19.56 0 top
U7  BME688LGA  [LGA_8PIN]  19.56,45.47 0 top
U8  BME688LGA  [LGA_8PIN]  45.47,45.47 0 top
U9  BME688LGA  [LGA_8PIN]  71.37,45.47 0 top
U10  BME688LGA  [LGA_8PIN]  97.28,45.47 0 top
U11  BME688LGA  [LGA_8PIN]  123.19,45.47 0 top
U12  BME688LGA  [LGA_8PIN]  149.1,45.47 0 top
U13  BME688LGA  [LGA_8PIN]  19.56,71.37 0 top
U14  BME688LGA  [LGA_8PIN]  45.47,71.37 0 top
U15  BME688LGA  [LGA_8PIN]  71.37,71.37 0 top
U16  BME688LGA  [LGA_8PIN]  97.28,71.37 0 top
U17  BME688LGA  [LGA_8PIN]  123.19,71.37 0 top
U18  BME688LGA  [LGA_8PIN]  149.1,71.37 0 top
U19  BME688LGA  [LGA_8PIN]  19.56,97.28 0 top
U20  BME688LGA  [LGA_8PIN]  45.47,97.28 0 top
U21  BME688LGA  [LGA_8PIN]  71.37,97.28 0 top
U22  BME688LGA  [LGA_8PIN]  97.28,97.28 0 top
U23  BME688LGA  [LGA_8PIN]  123.19,97.28 0 top
U24  BME688LGA  [LGA_8PIN]  149.1,97.28 0 top
U$1  [#GND#0]  18.29,8.51 90 bottom
U$2  [#SDO#0]  13.21,8.51 90 top
U$3  [#CSB#0]  20.07,23.37 0 bottom
U$4  [#GND#0]  44.2,8.51 90 top
U$5  [PWR0]  7.75,14.99 0 top
U$6  [#I2C#0]  25.91,25.4 0 bottom
U$7  [GAS_SENSOR_#_BME6880]  27.18,20.45 0 bottom
U$8  [#LED#0]  12.57,14.35 0 bottom
U$9  [0X760]  24.38,16.26 0 bottom
U$10  [GAS_SENSOR_#_BME6880]  11.3,28.19 0 top
U$11  [#ADR#0]  20.45,18.03 0 bottom
U$12  [DEFAULT_ADR#_0X760]  12.06,26.67 0 top
U$13  [0X770]  17.02,16.26 0 bottom
U$14  [#3V3#0]  20.83,8.51 90 top
U$15  [#3V3#0]  20.83,8.51 90 bottom
U$16  [#SDO#0]  13.21,8.51 90 bottom
U$17  [#SDA#0]  49.28,8.64 90 top
U$18  [#SCL#0]  51.82,8.64 90 top
U$19  [#SDI#0]  23.37,8.64 90 bottom
U$20  [#SCK#0]  25.91,8.64 90 bottom
U$21  [##CSB##0]  15.75,8.51 90 bottom
U$22  [##CSB##0]  15.75,8.51 90 top
U$23  [#GND#0]  44.2,8.51 90 bottom
U$24  [PWR0]  33.66,14.99 0 top
U$25  [GAS_SENSOR_#_BME6880]  37.21,28.19 0 top
U$26  [#ADR#0]  46.35,18.03 0 bottom
U$27  [GAS_SENSOR_#_BME6880]  53.09,20.45 0 bottom
U$28  [#LED#0]  38.48,14.35 0 bottom
U$29  [#I2C#0]  51.82,25.4 0 bottom
U$30  [DEFAULT_ADR#_0X760]  37.97,26.67 0 top
U$31  [0X760]  50.29,16.26 0 bottom
U$32  [0X770]  42.93,16.26 0 bottom
U$33  [#GND#0]  18.29,8.51 90 top
U$34  [#3V3#0]  46.74,8.51 90 top
U$35  [#SDA#0]  23.37,8.64 90 top
U$36  [#SCL#0]  25.91,8.64 90 top
U$37  [#3V3#0]  46.74,8.51 90 bottom
U$38  [#SDO#0]  39.12,8.51 90 top
U$39  [#SDO#0]  39.12,8.51 90 bottom
U$40  [#SDI#0]  49.28,8.64 90 bottom
U$41  [#SCK#0]  51.82,8.64 90 bottom
U$42  [#CSB#0]  45.97,23.37 0 bottom
U$43  [##CSB##0]  41.66,8.51 90 bottom
U$44  [##CSB##0]  41.66,8.51 90 top
U$45  [#GND#0]  70.1,8.51 90 top
U$46  [#SDA#0]  75.18,8.64 90 top
U$47  [#SCL#0]  77.72,8.64 90 top
U$48  [#GND#0]  70.1,8.51 90 bottom
U$49  [PWR0]  59.56,14.99 0 top
U$50  [GAS_SENSOR_#_BME6880]  63.12,28.19 0 top
U$51  [#ADR#0]  72.26,18.03 0 bottom
U$52  [GAS_SENSOR_#_BME6880]  78.99,20.45 0 bottom
U$53  [#LED#0]  64.39,14.35 0 bottom
U$54  [#I2C#0]  77.72,25.4 0 bottom
U$55  [DEFAULT_ADR#_0X760]  63.88,26.67 0 top
U$56  [0X760]  76.2,16.26 0 bottom
U$57  [0X770]  68.83,16.26 0 bottom
U$58  [#3V3#0]  72.64,8.51 90 top
U$59  [#3V3#0]  72.64,8.51 90 bottom
U$60  [#SDO#0]  65.02,8.51 90 top
U$61  [#SDO#0]  65.02,8.51 90 bottom
U$62  [#SDI#0]  75.18,8.64 90 bottom
U$63  [#SCK#0]  77.72,8.64 90 bottom
U$64  [#CSB#0]  71.88,23.37 0 bottom
U$65  [##CSB##0]  67.56,8.51 90 bottom
U$66  [##CSB##0]  67.56,8.51 90 top
U$67  [#GND#0]  96.01,8.51 90 top
U$68  [#SDA#0]  101.09,8.64 90 top
U$69  [#SCL#0]  103.63,8.64 90 top
U$70  [#GND#0]  96.01,8.51 90 bottom
U$71  [PWR0]  85.47,14.99 0 top
U$72  [GAS_SENSOR_#_BME6880]  89.03,28.19 0 top
U$73  [#ADR#0]  98.17,18.03 0 bottom
U$74  [GAS_SENSOR_#_BME6880]  104.9,20.45 0 bottom
U$75  [#LED#0]  90.3,14.35 0 bottom
U$76  [#I2C#0]  103.63,25.4 0 bottom
U$77  [DEFAULT_ADR#_0X760]  89.79,26.67 0 top
U$78  [0X760]  102.11,16.26 0 bottom
U$79  [0X770]  94.74,16.26 0 bottom
U$80  [#3V3#0]  98.55,8.51 90 top
U$81  [#3V3#0]  98.55,8.51 90 bottom
U$82  [#SDO#0]  90.93,8.51 90 top
U$83  [#SDO#0]  90.93,8.51 90 bottom
U$84  [#SDI#0]  101.09,8.64 90 bottom
U$85  [#SCK#0]  103.63,8.64 90 bottom
U$86  [#CSB#0]  97.79,23.37 0 bottom
U$87  [##CSB##0]  93.47,8.51 90 bottom
U$88  [##CSB##0]  93.47,8.51 90 top
U$89  [#GND#0]  121.92,8.51 90 top
U$90  [#SDA#0]  127,8.64 90 top
U$91  [#SCL#0]  129.54,8.64 90 top
U$92  [#GND#0]  121.92,8.51 90 bottom
U$93  [PWR0]  111.38,14.99 0 top
U$94  [GAS_SENSOR_#_BME6880]  114.94,28.19 0 top
U$95  [#ADR#0]  124.08,18.03 0 bottom
U$96  [GAS_SENSOR_#_BME6880]  130.81,20.45 0 bottom
U$97  [#LED#0]  116.2,14.35 0 bottom
U$98  [#I2C#0]  129.54,25.4 0 bottom
U$99  [DEFAULT_ADR#_0X760]  115.7,26.67 0 top
U$100  [0X760]  128.02,16.26 0 bottom
U$101  [0X770]  120.65,16.26 0 bottom
U$102  [#3V3#0]  124.46,8.51 90 top
U$103  [#3V3#0]  124.46,8.51 90 bottom
U$104  [#SDO#0]  116.84,8.51 90 top
U$105  [#SDO#0]  116.84,8.51 90 bottom
U$106  [#SDI#0]  127,8.64 90 bottom
U$107  [#SCK#0]  129.54,8.64 90 bottom
U$108  [#CSB#0]  123.7,23.37 0 bottom
U$109  [##CSB##0]  119.38,8.51 90 bottom
U$110  [##CSB##0]  119.38,8.51 90 top
U$111  [#GND#0]  147.83,8.51 90 top
U$112  [#SDA#0]  152.91,8.64 90 top
U$113  [#SCL#0]  155.45,8.64 90 top
U$114  [#GND#0]  147.83,8.51 90 bottom
U$115  [PWR0]  137.29,14.99 0 top
U$116  [GAS_SENSOR_#_BME6880]  140.84,28.19 0 top
U$117  [#ADR#0]  149.99,18.03 0 bottom
U$118  [GAS_SENSOR_#_BME6880]  156.72,20.45 0 bottom
U$119  [#LED#0]  142.11,14.35 0 bottom
U$120  [#I2C#0]  155.45,25.4 0 bottom
U$121  [DEFAULT_ADR#_0X760]  141.61,26.67 0 top
U$122  [0X760]  153.92,16.26 0 bottom
U$123  [0X770]  146.56,16.26 0 bottom
U$124  [#3V3#0]  150.37,8.51 90 top
U$125  [#3V3#0]  150.37,8.51 90 bottom
U$126  [#SDO#0]  142.75,8.51 90 top
U$127  [#SDO#0]  142.75,8.51 90 bottom
U$128  [#SDI#0]  152.91,8.64 90 bottom
U$129  [#SCK#0]  155.45,8.64 90 bottom
U$130  [#CSB#0]  149.61,23.37 0 bottom
U$131  [##CSB##0]  145.29,8.51 90 bottom
U$132  [##CSB##0]  145.29,8.51 90 top
U$133  [#GND#0]  18.29,34.42 90 top
U$134  [#SDA#0]  23.37,34.54 90 top
U$135  [#SCL#0]  25.91,34.54 90 top
U$136  [#GND#0]  18.29,34.42 90 bottom
U$137  [PWR0]  7.75,40.89 0 top
U$138  [GAS_SENSOR_#_BME6880]  11.3,54.1 0 top
U$139  [#ADR#0]  20.45,43.94 0 bottom
U$140  [GAS_SENSOR_#_BME6880]  27.18,46.35 0 bottom
U$141  [#LED#0]  12.57,40.26 0 bottom
U$142  [#I2C#0]  25.91,51.31 0 bottom
U$143  [DEFAULT_ADR#_0X760]  12.06,52.58 0 top
U$144  [0X760]  24.38,42.16 0 bottom
U$145  [0X770]  17.02,42.16 0 bottom
U$146  [#3V3#0]  20.83,34.42 90 top
U$147  [#3V3#0]  20.83,34.42 90 bottom
U$148  [#SDO#0]  13.21,34.42 90 top
U$149  [#SDO#0]  13.21,34.42 90 bottom
U$150  [#SDI#0]  23.37,34.54 90 bottom
U$151  [#SCK#0]  25.91,34.54 90 bottom
U$152  [#CSB#0]  20.07,49.28 0 bottom
U$153  [##CSB##0]  15.75,34.42 90 bottom
U$154  [##CSB##0]  15.75,34.42 90 top
U$155  [#GND#0]  44.2,34.42 90 top
U$156  [#SDA#0]  49.28,34.54 90 top
U$157  [#SCL#0]  51.82,34.54 90 top
U$158  [#GND#0]  44.2,34.42 90 bottom
U$159  [PWR0]  33.66,40.89 0 top
U$160  [GAS_SENSOR_#_BME6880]  37.21,54.1 0 top
U$161  [#ADR#0]  46.35,43.94 0 bottom
U$162  [GAS_SENSOR_#_BME6880]  53.09,46.35 0 bottom
U$163  [#LED#0]  38.48,40.26 0 bottom
U$164  [#I2C#0]  51.82,51.31 0 bottom
U$165  [DEFAULT_ADR#_0X760]  37.97,52.58 0 top
U$166  [0X760]  50.29,42.16 0 bottom
U$167  [0X770]  42.93,42.16 0 bottom
U$168  [#3V3#0]  46.74,34.42 90 top
U$169  [#3V3#0]  46.74,34.42 90 bottom
U$170  [#SDO#0]  39.12,34.42 90 top
U$171  [#SDO#0]  39.12,34.42 90 bottom
U$172  [#SDI#0]  49.28,34.54 90 bottom
U$173  [#SCK#0]  51.82,34.54 90 bottom
U$174  [#CSB#0]  45.97,49.28 0 bottom
U$175  [##CSB##0]  41.66,34.42 90 bottom
U$176  [##CSB##0]  41.66,34.42 90 top
U$177  [#GND#0]  70.1,34.42 90 top
U$178  [#SDA#0]  75.18,34.54 90 top
U$179  [#SCL#0]  77.72,34.54 90 top
U$180  [#GND#0]  70.1,34.42 90 bottom
U$181  [PWR0]  59.56,40.89 0 top
U$182  [GAS_SENSOR_#_BME6880]  63.12,54.1 0 top
U$183  [#ADR#0]  72.26,43.94 0 bottom
U$184  [GAS_SENSOR_#_BME6880]  78.99,46.35 0 bottom
U$185  [#LED#0]  64.39,40.26 0 bottom
U$186  [#I2C#0]  77.72,51.31 0 bottom
U$187  [DEFAULT_ADR#_0X760]  63.88,52.58 0 top
U$188  [0X760]  76.2,42.16 0 bottom
U$189  [0X770]  68.83,42.16 0 bottom
U$190  [#3V3#0]  72.64,34.42 90 top
U$191  [#3V3#0]  72.64,34.42 90 bottom
U$192  [#SDO#0]  65.02,34.42 90 top
U$193  [#SDO#0]  65.02,34.42 90 bottom
U$194  [#SDI#0]  75.18,34.54 90 bottom
U$195  [#SCK#0]  77.72,34.54 90 bottom
U$196  [#CSB#0]  71.88,49.28 0 bottom
U$197  [##CSB##0]  67.56,34.42 90 bottom
U$198  [##CSB##0]  67.56,34.42 90 top
U$199  [#GND#0]  96.01,34.42 90 top
U$200  [#SDA#0]  101.09,34.54 90 top
U$201  [#SCL#0]  103.63,34.54 90 top
U$202  [#GND#0]  96.01,34.42 90 bottom
U$203  [PWR0]  85.47,40.89 0 top
U$204  [GAS_SENSOR_#_BME6880]  89.03,54.1 0 top
U$205  [#ADR#0]  98.17,43.94 0 bottom
U$206  [GAS_SENSOR_#_BME6880]  104.9,46.35 0 bottom
U$207  [#LED#0]  90.3,40.26 0 bottom
U$208  [#I2C#0]  103.63,51.31 0 bottom
U$209  [DEFAULT_ADR#_0X760]  89.79,52.58 0 top
U$210  [0X760]  102.11,42.16 0 bottom
U$211  [0X770]  94.74,42.16 0 bottom
U$212  [#3V3#0]  98.55,34.42 90 top
U$213  [#3V3#0]  98.55,34.42 90 bottom
U$214  [#SDO#0]  90.93,34.42 90 top
U$215  [#SDO#0]  90.93,34.42 90 bottom
U$216  [#SDI#0]  101.09,34.54 90 bottom
U$217  [#SCK#0]  103.63,34.54 90 bottom
U$218  [#CSB#0]  97.79,49.28 0 bottom
U$219  [##CSB##0]  93.47,34.42 90 bottom
U$220  [##CSB##0]  93.47,34.42 90 top
U$221  [#GND#0]  121.92,34.42 90 top
U$222  [#SDA#0]  127,34.54 90 top
U$223  [#SCL#0]  129.54,34.54 90 top
U$224  [#GND#0]  121.92,34.42 90 bottom
U$225  [PWR0]  111.38,40.89 0 top
U$226  [GAS_SENSOR_#_BME6880]  114.94,54.1 0 top
U$227  [#ADR#0]  124.08,43.94 0 bottom
U$228  [GAS_SENSOR_#_BME6880]  130.81,46.35 0 bottom
U$229  [#LED#0]  116.2,40.26 0 bottom
U$230  [#I2C#0]  129.54,51.31 0 bottom
U$231  [DEFAULT_ADR#_0X760]  115.7,52.58 0 top
U$232  [0X760]  128.02,42.16 0 bottom
U$233  [0X770]  120.65,42.16 0 bottom
U$234  [#3V3#0]  124.46,34.42 90 top
U$235  [#3V3#0]  124.46,34.42 90 bottom
U$236  [#SDO#0]  116.84,34.42 90 top
U$237  [#SDO#0]  116.84,34.42 90 bottom
U$238  [#SDI#0]  127,34.54 90 bottom
U$239  [#SCK#0]  129.54,34.54 90 bottom
U$240  [#CSB#0]  123.7,49.28 0 bottom
U$241  [##CSB##0]  119.38,34.42 90 bottom
U$242  [##CSB##0]  119.38,34.42 90 top
U$243  [#GND#0]  147.83,34.42 90 top
U$244  [#SDA#0]  152.91,34.54 90 top
U$245  [#SCL#0]  155.45,34.54 90 top
U$246  [#GND#0]  147.83,34.42 90 bottom
U$247  [PWR0]  137.29,40.89 0 top
U$248  [GAS_SENSOR_#_BME6880]  140.84,54.1 0 top
U$249  [#ADR#0]  149.99,43.94 0 bottom
U$250  [GAS_SENSOR_#_BME6880]  156.72,46.35 0 bottom
U$251  [#LED#0]  142.11,40.26 0 bottom
U$252  [#I2C#0]  155.45,51.31 0 bottom
U$253  [DEFAULT_ADR#_0X760]  141.61,52.58 0 top
U$254  [0X760]  153.92,42.16 0 bottom
U$255  [0X770]  146.56,42.16 0 bottom
U$256  [#3V3#0]  150.37,34.42 90 top
U$257  [#3V3#0]  150.37,34.42 90 bottom